# Altium PCB probe.PcbDoc (part 1 of 2)
Units mil, origin at the board's own origin, x right, y up, seen from the top; angles counter-clockwise.
Board outline 2800 x 2200 mil, 4 copper layers (Top Layer, Internal Plane 2, Internal Plane 1, Bottom Layer), stack 30.634 mil thick; 179 components, 135 nets, 563 pads, 179 vias.
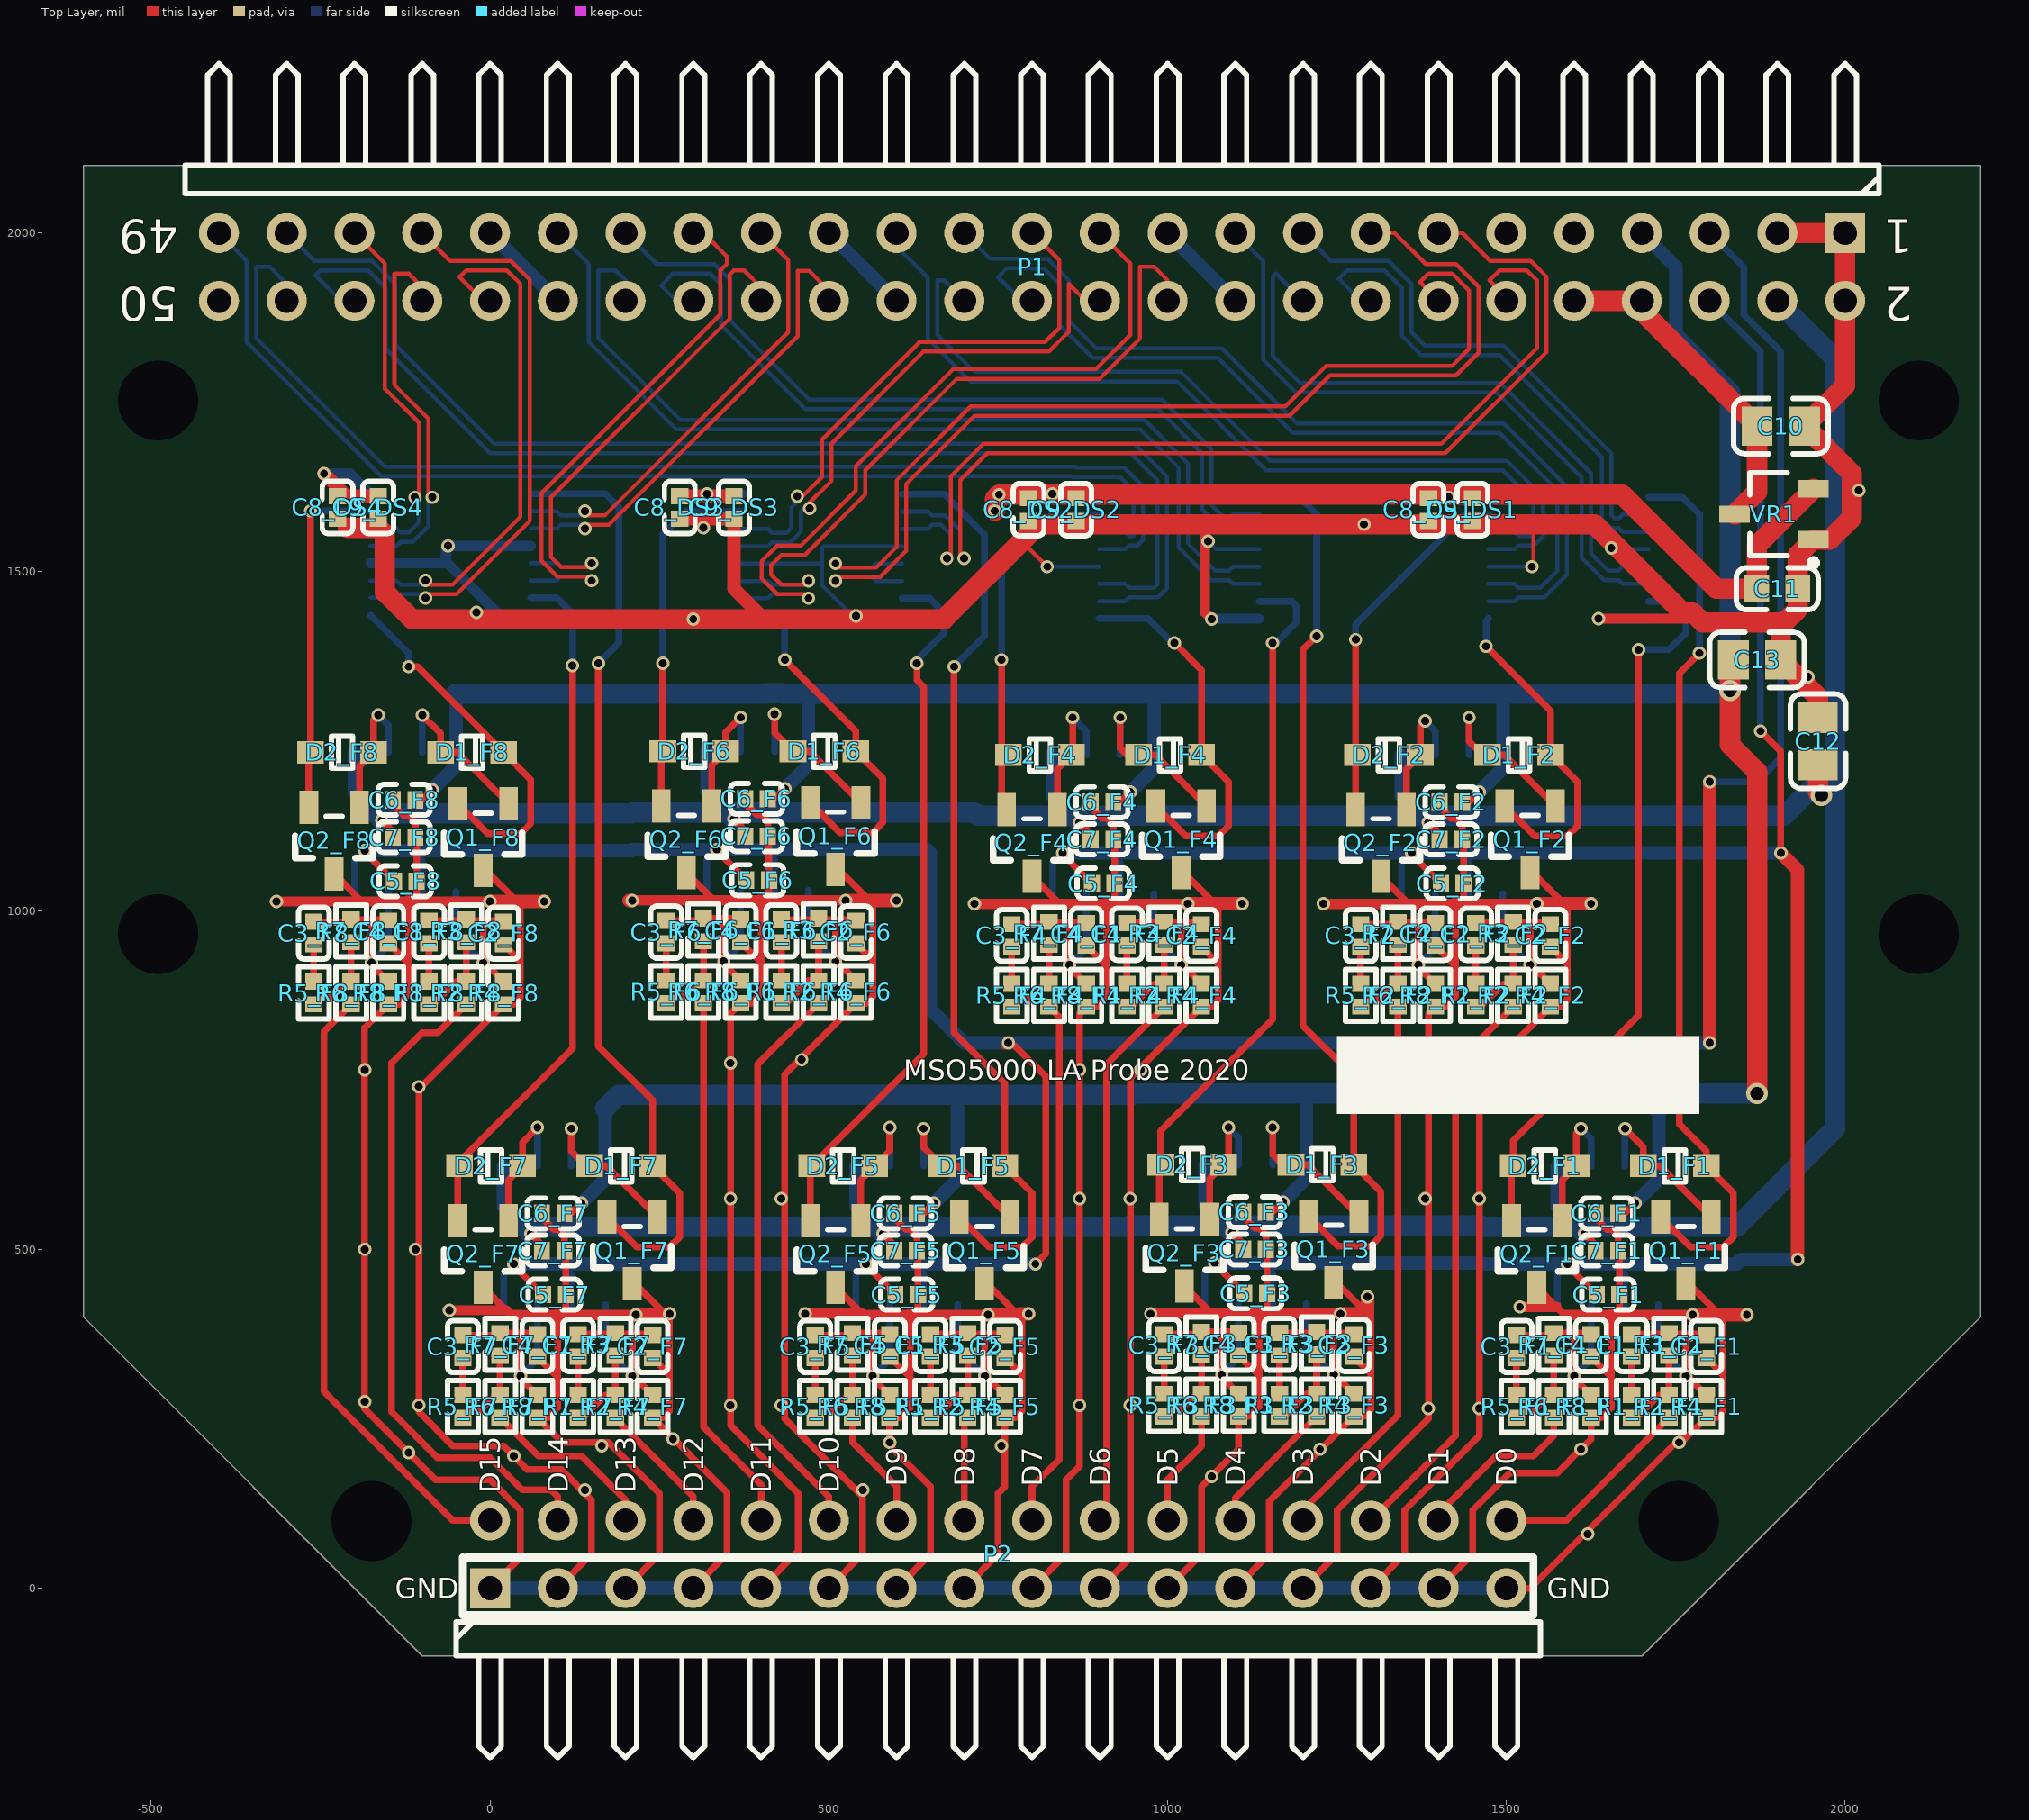
[diagram p0: Top Layer view]
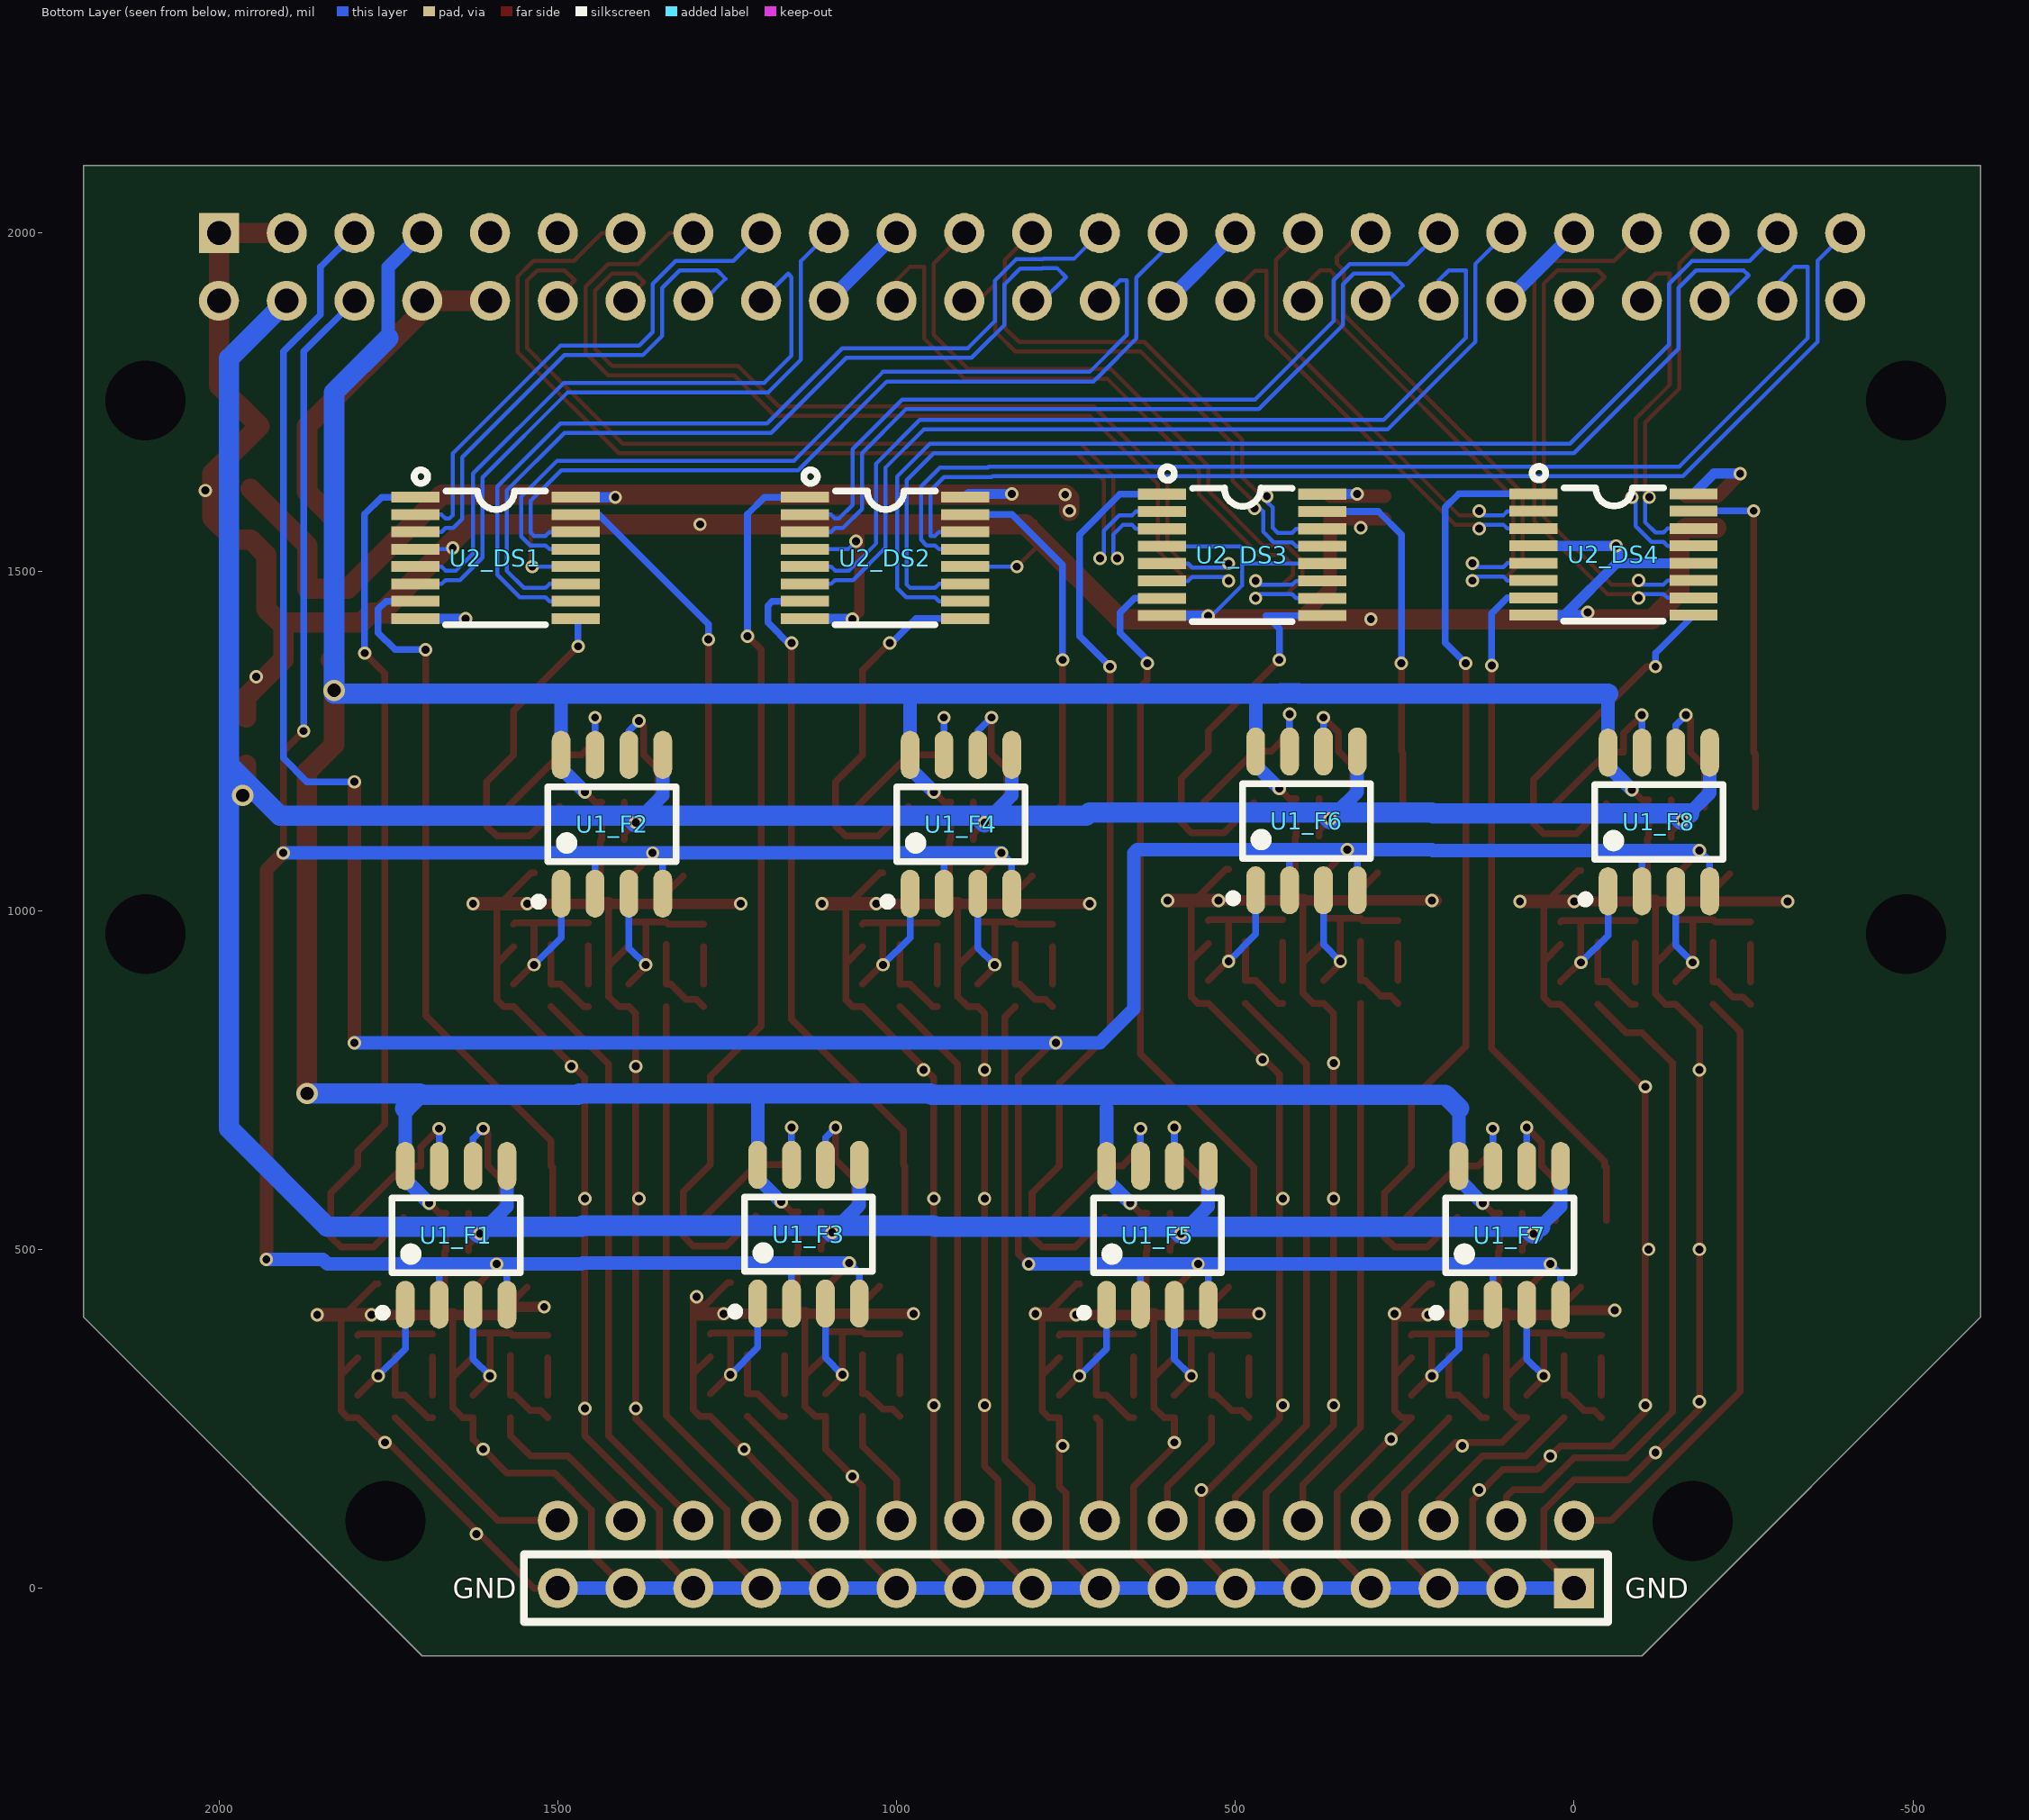
[diagram p1: Bottom Layer view, seen from below]
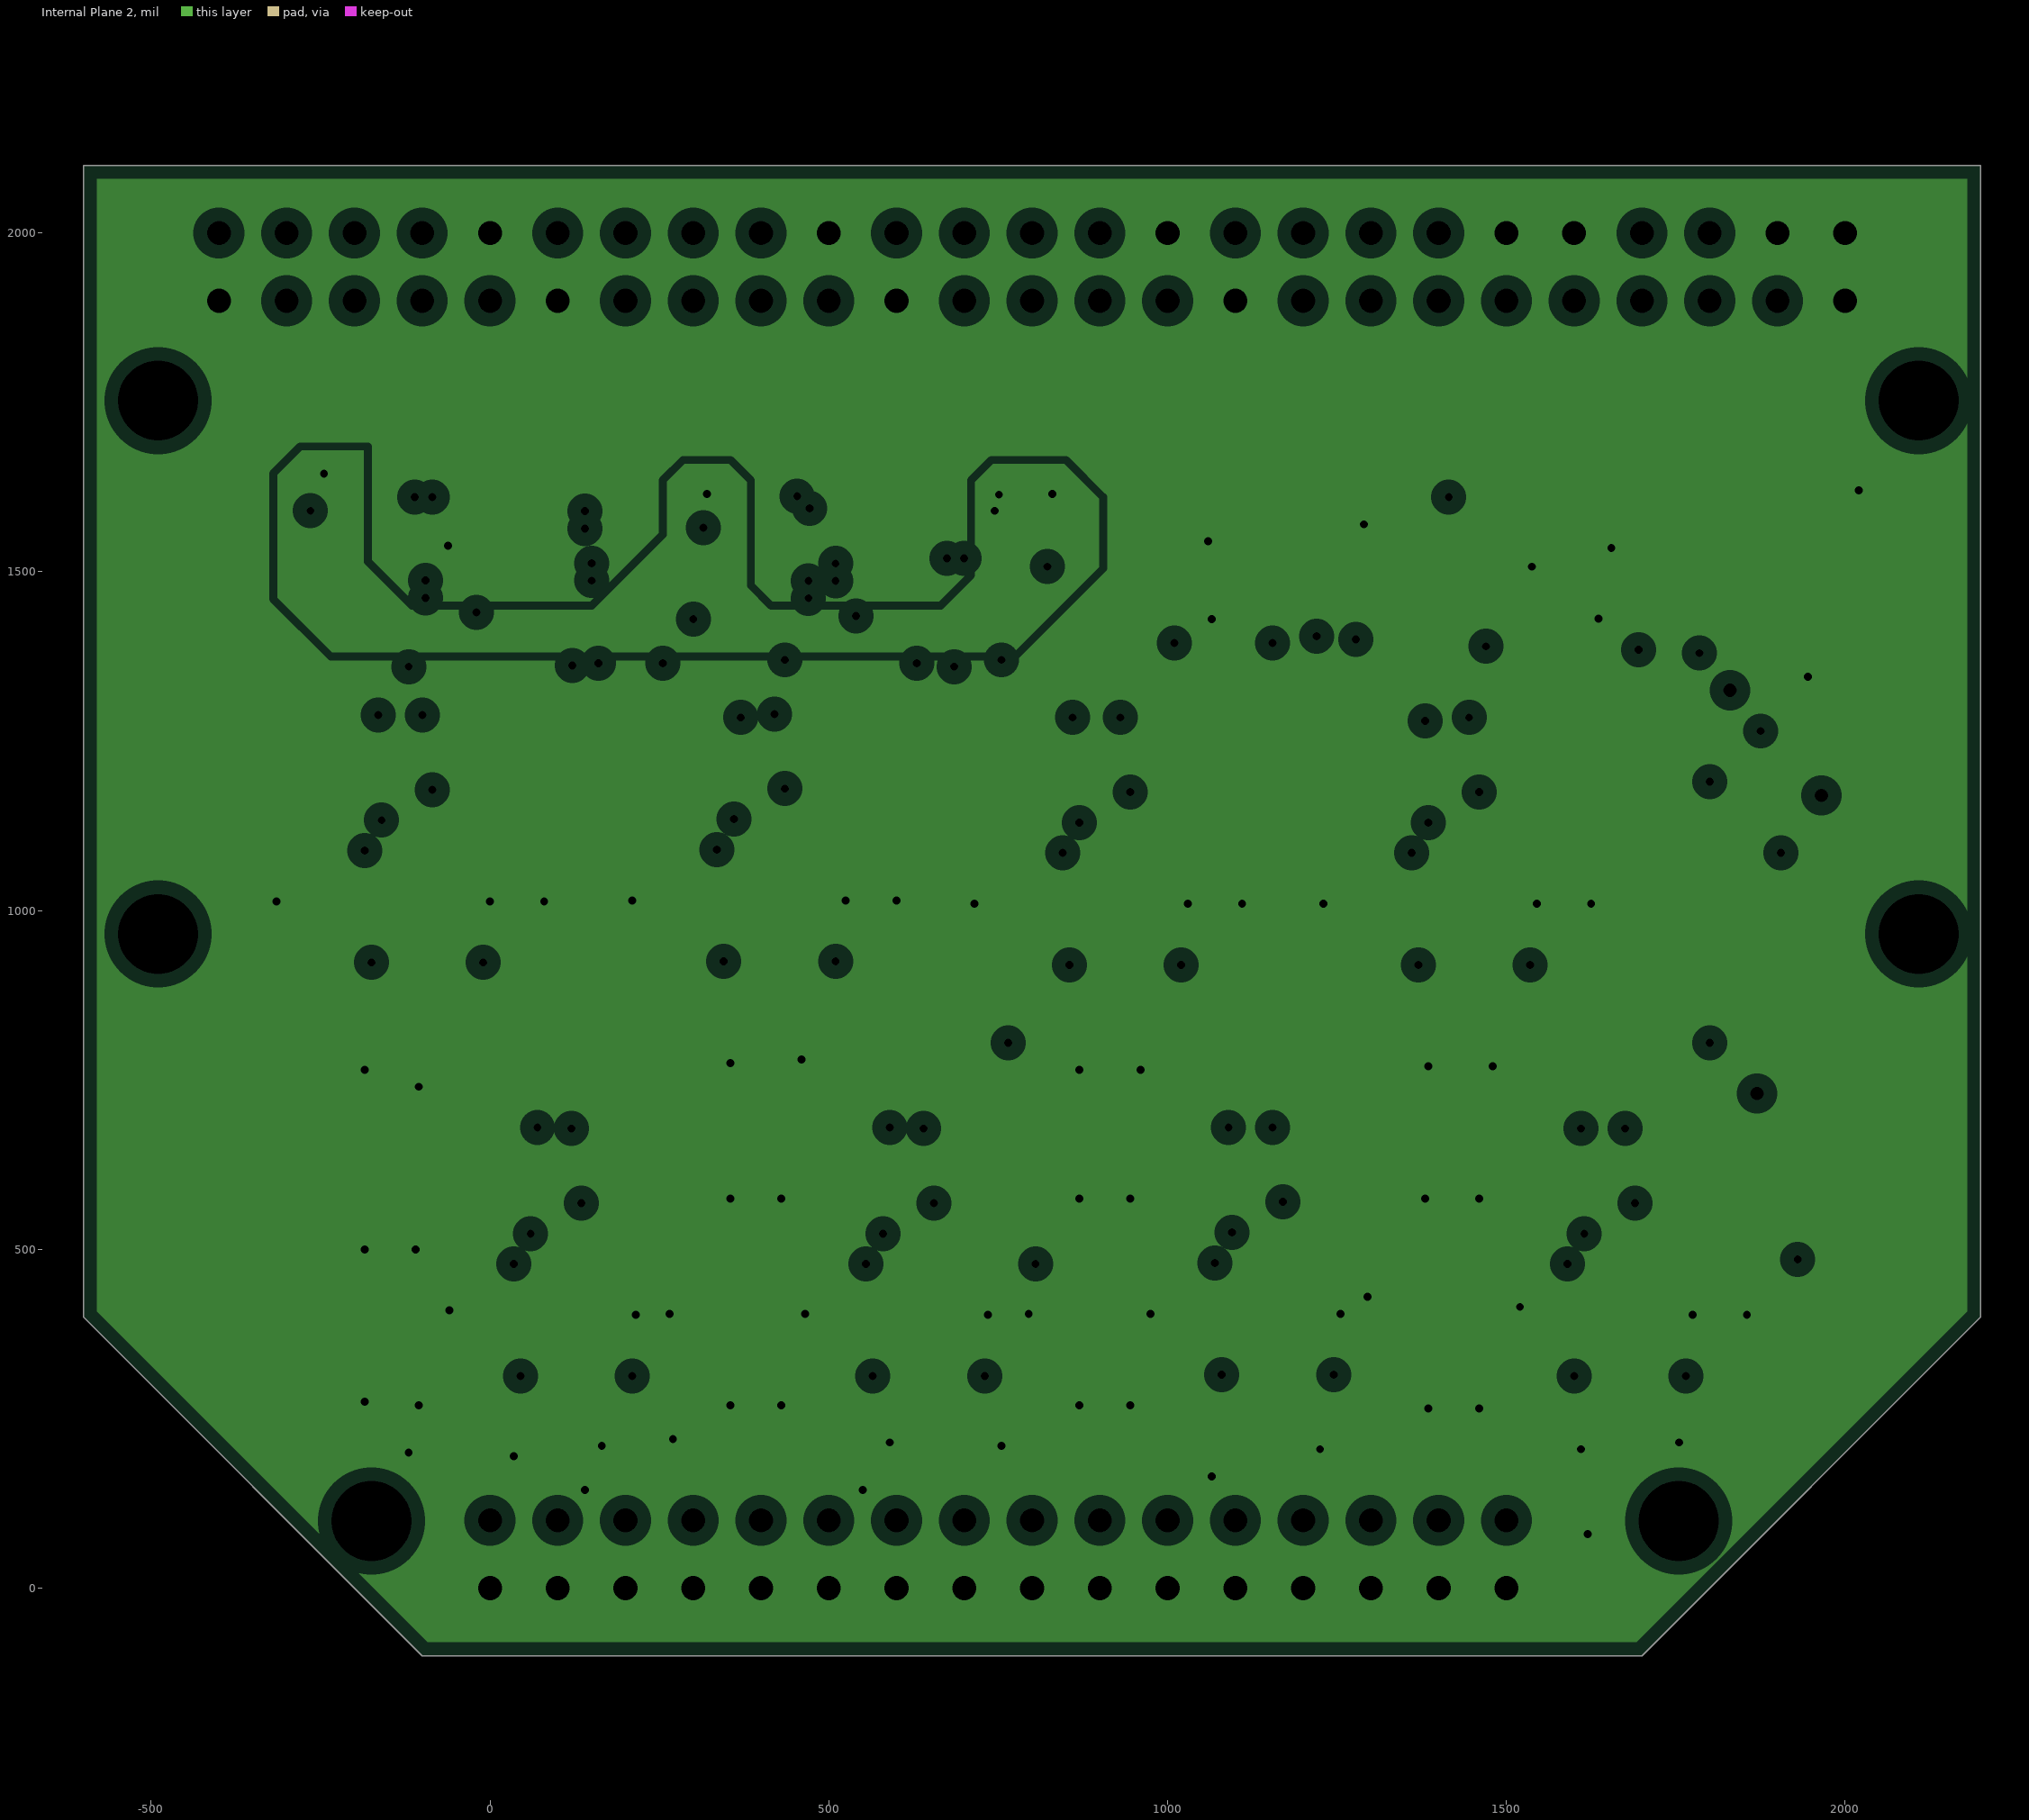
[diagram p2: Internal Plane 2, clearances drawn from the general rule]
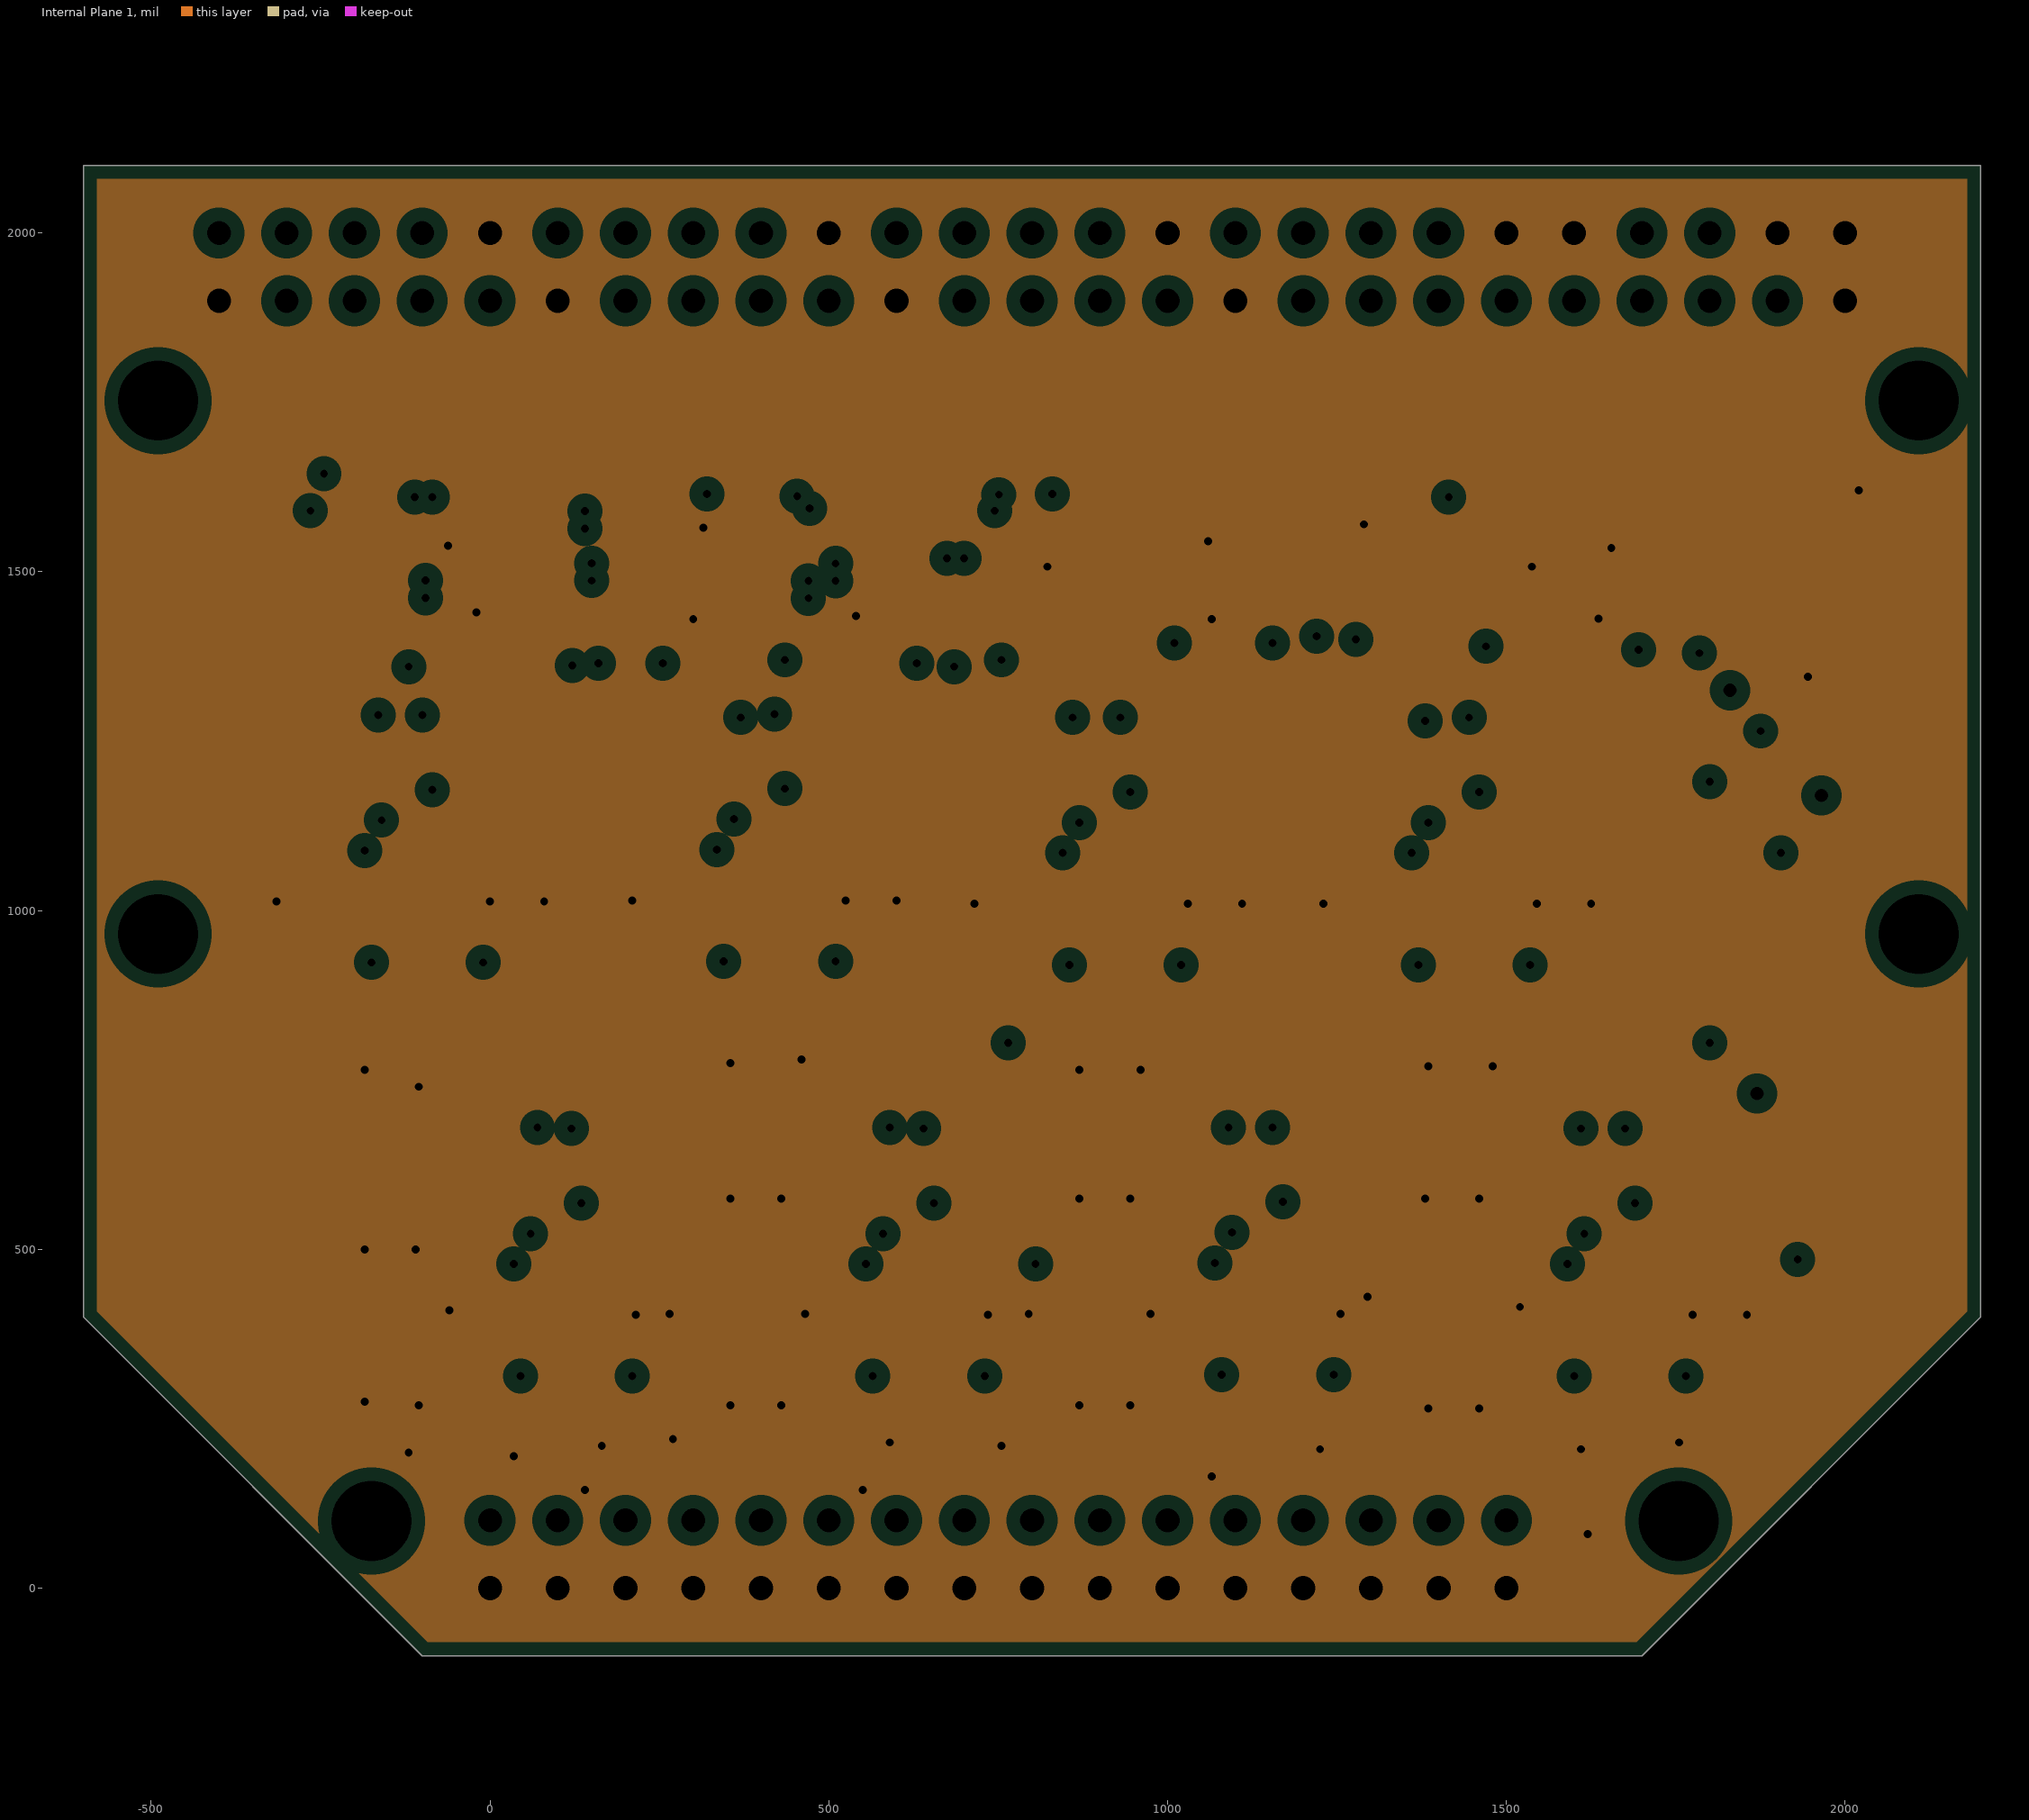
[diagram p3: Internal Plane 1, clearances drawn from the general rule]
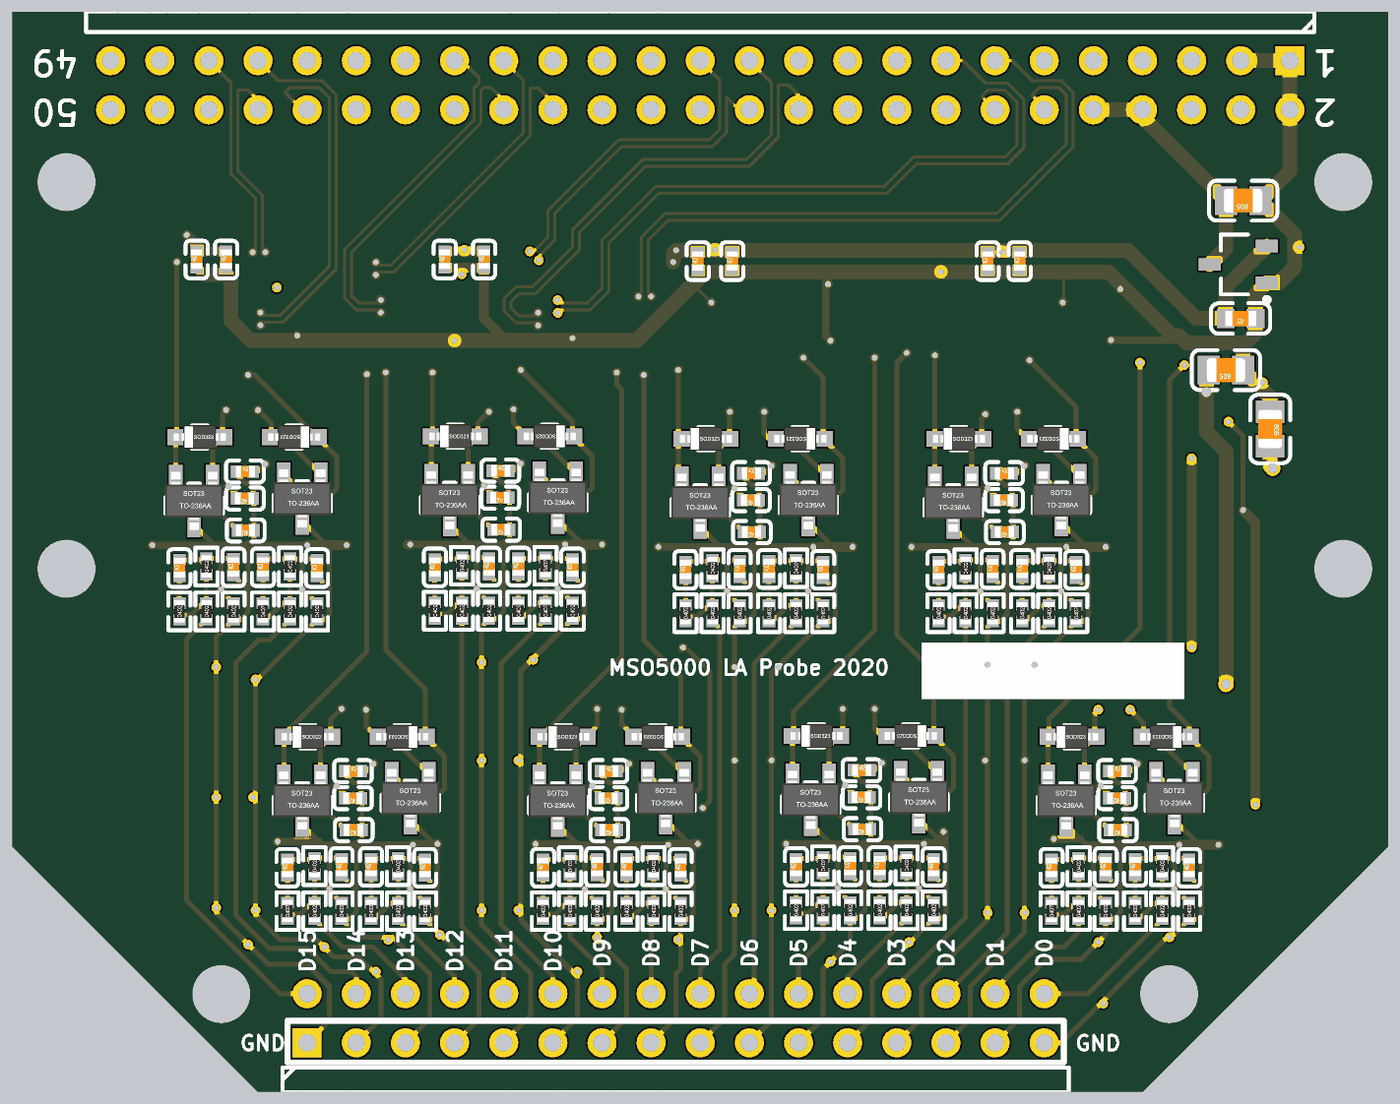
[diagram p5: 3D render of the assembled board from above, using the file's embedded part models]

## Layer stack, top to bottom
Top Solder: solder mask 0.4, Solder Resist, Dk 3.5
Top Layer: signal copper 1.4
Dielectric 1: core 10, FR-4, Dk 4.2
Internal Plane 2: plane copper 1.417, net GND
Dielectric 3: prepreg 5, Dk 4.2
Internal Plane 1: plane copper 1.417, net GND
Dielectric 2: core 10, Dk 4.2
Bottom Layer: signal copper 1.4
Bottom Solder: solder mask 0.4, Solder Resist, Dk 3.5

## Board outline
-600,400 -100,-100 1700,-100 2200,400 2200,2100 -600,2100

## Design rules (kind name [scope] priority, off if disabled: settings)
Clearance [All] p1: gap=6 ignorepadtopadclearanceinfootprint=FALSE
DiffPairsRouting [All] p1: maxlimit=10 minlimit=6 mostfreqgap=8 toplayer_minwidth=6 toplayer_maxwidth=15 toplayer_prefwidth=8 bottomlayer_minwidth=6 bottomlayer_maxwidth=15 bottomlayer_prefwidth=8 maxuncoupledlength=500
HoleSize [All] p1: absolutevalues=TRUE maxlimit=118.11 minlimit=11.81 maxpercent=80.000 minpercent=20.000
MinimumSolderMaskSliver [All] p1: minsoldermaskwidth=0
PlaneClearance [All] p1: clearance=20
PlaneConnect PlaneConnect_1 [IsVia] p1: planeconnectstyle=Direct reliefexpansion=20 reliefentries=4 reliefconductorwidth=10 reliefairgap=10
PlaneConnect [All] p2: planeconnectstyle=Relief reliefexpansion=20 reliefentries=4 reliefconductorwidth=10 reliefairgap=10
PolygonConnect PolygonConnect_1 [All vs isvia] p1: connectstyle=Direct reliefconductorwidth=10 reliefentries=4 polygonreliefangle="90 Angle" airgapwidth=10
PolygonConnect [All] p2: connectstyle=Relief reliefconductorwidth=10 reliefentries=4 polygonreliefangle="90 Angle" airgapwidth=10
RoomDefinition probe [InComponentClass('probe')] p1: confinementstyle=ConfineIn formatcopy=TRUE lockcomponents=FALSE outline 2295,-355 2295,2465 -805,2465 -805,-355
RoomDefinition F8 [InComponentClass('F8')] p2: confinementstyle=ConfineIn formatcopy=TRUE lockcomponents=FALSE outline -335,823.46 100,823.46 100,1398.46 -335,1398.46
RoomDefinition F7 [InComponentClass('F7')] p3: confinementstyle=ConfineIn formatcopy=TRUE lockcomponents=FALSE outline -115,213.27 320,213.27 320,788.27 -115,788.27
RoomDefinition F6 [InComponentClass('F6')] p4: confinementstyle=ConfineIn formatcopy=TRUE lockcomponents=FALSE outline 185,825 620,825 620,1400 185,1400
RoomDefinition F5 [InComponentClass('F5')] p5: confinementstyle=ConfineIn formatcopy=TRUE lockcomponents=FALSE outline 405,213.27 840,213.27 840,788.27 405,788.27
RoomDefinition F4 [InComponentClass('F4')] p6: confinementstyle=ConfineIn formatcopy=TRUE lockcomponents=FALSE outline 695,820 1130,820 1130,1395 695,1395
RoomDefinition F3 [InComponentClass('F3')] p7: confinementstyle=ConfineIn formatcopy=TRUE lockcomponents=FALSE outline 920,215 1355,215 1355,790 920,790
RoomDefinition F2 [InComponentClass('F2')] p8: confinementstyle=ConfineIn formatcopy=TRUE lockcomponents=FALSE outline 1210,820 1645,820 1645,1395 1210,1395
RoomDefinition F1 [InComponentClass('F1')] p9: confinementstyle=ConfineIn formatcopy=FALSE lockcomponents=FALSE outline 1440,213.27 1875,213.27 1875,788.27 1440,788.27
RoomDefinition DS4 [InComponentClass('DS4')] p10: confinementstyle=ConfineIn formatcopy=TRUE lockcomponents=FALSE outline -283.11,1405.43 151.89,1405.43 151.89,1785.43 -283.11,1785.43
RoomDefinition DS3 [InComponentClass('DS3')] p11: confinementstyle=ConfineIn formatcopy=TRUE lockcomponents=FALSE outline 235,1405 700,1405 700,1785 235,1785
RoomDefinition DS2 [InComponentClass('DS2')] p12: confinementstyle=ConfineIn formatcopy=TRUE lockcomponents=FALSE outline 750,1400.43 1226.89,1400.43 1226.89,1785 750,1785
RoomDefinition DS1 [InComponentClass('DS1')] p13: confinementstyle=ConfineIn formatcopy=FALSE lockcomponents=FALSE outline 1340,1400.43 1801.89,1400.43 1801.89,1780 1340,1780
RoutingVias [All] p1: holewidth=11.81 width=19.68 viastyle="Through Hole" minholewidth=11.81 minwidth=19.68 maxholewidth=28 maxwidth=50
SilkToSilkClearance [All] p1: silktosilkclearance=1
SilkToSolderMaskClearance [IsPad] p1: minsilkscreentomaskgap=1 clearancetoexposedcopper=TRUE
SolderMaskExpansion [All] p1: expansion=4
Width [All] p1: maxlimit=30 minlimit=6 preferedwidth=8
23 further rules are at their usual default settings.

## Classes and differential pairs
component class DS1: C8_DS1 C9_DS1 U2_DS1
component class DS2: C8_DS2 C9_DS2 U2_DS2
component class DS3: C8_DS3 C9_DS3 U2_DS3
component class DS4: C8_DS4 C9_DS4 U2_DS4
component class F1: C1_F1 C2_F1 C3_F1 C4_F1 C5_F1 C6_F1 C7_F1 D1_F1 D2_F1 Q1_F1 Q2_F1 R1_F1 R2_F1 R3_F1 R4_F1 R5_F1 R6_F1 R7_F1 R8_F1 U1_F1
component class F2: C1_F2 C2_F2 C3_F2 C4_F2 C5_F2 C6_F2 C7_F2 D1_F2 D2_F2 Q1_F2 Q2_F2 R1_F2 R2_F2 R3_F2 R4_F2 R5_F2 R6_F2 R7_F2 R8_F2 U1_F2
component class F3: C1_F3 C2_F3 C3_F3 C4_F3 C5_F3 C6_F3 C7_F3 D1_F3 D2_F3 Q1_F3 Q2_F3 R1_F3 R2_F3 R3_F3 R4_F3 R5_F3 R6_F3 R7_F3 R8_F3 U1_F3
component class F4: C1_F4 C2_F4 C3_F4 C4_F4 C5_F4 C6_F4 C7_F4 D1_F4 D2_F4 Q1_F4 Q2_F4 R1_F4 R2_F4 R3_F4 R4_F4 R5_F4 R6_F4 R7_F4 R8_F4 U1_F4
component class F5: C1_F5 C2_F5 C3_F5 C4_F5 C5_F5 C6_F5 C7_F5 D1_F5 D2_F5 Q1_F5 Q2_F5 R1_F5 R2_F5 R3_F5 R4_F5 R5_F5 R6_F5 R7_F5 R8_F5 U1_F5
component class F6: C1_F6 C2_F6 C3_F6 C4_F6 C5_F6 C6_F6 C7_F6 D1_F6 D2_F6 Q1_F6 Q2_F6 R1_F6 R2_F6 R3_F6 R4_F6 R5_F6 R6_F6 R7_F6 R8_F6 U1_F6
component class F7: C1_F7 C2_F7 C3_F7 C4_F7 C5_F7 C6_F7 C7_F7 D1_F7 D2_F7 Q1_F7 Q2_F7 R1_F7 R2_F7 R3_F7 R4_F7 R5_F7 R6_F7 R7_F7 R8_F7 U1_F7
component class F8: C1_F8 C2_F8 C3_F8 C4_F8 C5_F8 C6_F8 C7_F8 D1_F8 D2_F8 Q1_F8 Q2_F8 R1_F8 R2_F8 R3_F8 R4_F8 R5_F8 R6_F8 R7_F8 R8_F8 U1_F8
component class probe: C10 C11 C12 C13 P1 P2 VR1
channel class front2ch: F1 F2 F3 F4 F5 F6 F7 F8
channel class lvds4ch: DS1 DS2 DS3 DS4
differential pair D0: +D0_P -D0_N
differential pair D1: +D1_P -D1_N
differential pair D2: +D2_P -D2_N
differential pair D3: +D3_P -D3_N
differential pair D4: +D4_P -D4_N
differential pair D5: +D5_P -D5_N
differential pair D6: +D6_P -D6_N
differential pair D7: +D7_P -D7_N
differential pair D8: +D8_P -D8_N
differential pair D9: +D9_P -D9_N
differential pair D10: +D10_P -D10_N
differential pair D11: +D11_P -D11_N
differential pair D12: +D12_P -D12_N
differential pair D13: +D13_P -D13_N
differential pair D14: +D14_P -D14_N
differential pair D15: +D15_P -D15_N

## Components (designator, comment, footprint, x,y, rotation, side; value= is the part's Value field where it differs from the comment)
C1_F1 "3.3pF (3R3) 0.25pF 50V" 0402_C 1685,358.27 r90 top (schematic designator C1)
C1_F2 "3.3pF (3R3) 0.25pF 50V" 0402_C 1455,965 r90 top (schematic designator C1)
C1_F3 "3.3pF (3R3) 0.25pF 50V" 0402_C 1165,360 r90 top (schematic designator C1)
C1_F4 "3.3pF (3R3) 0.25pF 50V" 0402_C 940,965 r90 top (schematic designator C1)
C1_F5 "3.3pF (3R3) 0.25pF 50V" 0402_C 650,358.27 r90 top (schematic designator C1)
C1_F6 "3.3pF (3R3) 0.25pF 50V" 0402_C 430,970 r90 top (schematic designator C1)
C1_F7 "3.3pF (3R3) 0.25pF 50V" 0402_C 130,358.27 r90 top (schematic designator C1)
C1_F8 "3.3pF (3R3) 0.25pF 50V" 0402_C -90,968.46 r90 top (schematic designator C1)
C2_F1 "27pF (270) 5% 50V" 0402_C 1795,356.54 r90 top (schematic designator C2)
C2_F2 "27pF (270) 5% 50V" 0402_C 1565,963.27 r90 top (schematic designator C2)
C2_F3 "27pF (270) 5% 50V" 0402_C 1275,358.27 r90 top (schematic designator C2)
C2_F4 "27pF (270) 5% 50V" 0402_C 1050,963.27 r90 top (schematic designator C2)
C2_F5 "27pF (270) 5% 50V" 0402_C 760,356.54 r90 top (schematic designator C2)
C2_F6 "27pF (270) 5% 50V" 0402_C 540,968.27 r90 top (schematic designator C2)
C2_F7 "27pF (270) 5% 50V" 0402_C 240,356.54 r90 top (schematic designator C2)
C2_F8 "27pF (270) 5% 50V" 0402_C 20,966.73 r90 top (schematic designator C2)
C3_F1 "3.3pF (3R3) 0.25pF 50V" 0402_C 1515,356.54 r90 top (schematic designator C3)
C3_F2 "3.3pF (3R3) 0.25pF 50V" 0402_C 1285,963.27 r90 top (schematic designator C3)
C3_F3 "3.3pF (3R3) 0.25pF 50V" 0402_C 995,358.27 r90 top (schematic designator C3)
C3_F4 "3.3pF (3R3) 0.25pF 50V" 0402_C 770,963.27 r90 top (schematic designator C3)
C3_F5 "3.3pF (3R3) 0.25pF 50V" 0402_C 480,356.54 r90 top (schematic designator C3)
C3_F6 "3.3pF (3R3) 0.25pF 50V" 0402_C 260,968.27 r90 top (schematic designator C3)
C3_F7 "3.3pF (3R3) 0.25pF 50V" 0402_C -40,356.54 r90 top (schematic designator C3)
C3_F8 "3.3pF (3R3) 0.25pF 50V" 0402_C -260,966.73 r90 top (schematic designator C3)
C4_F1 "27pF (270) 5% 50V" 0402_C 1625,358.27 r90 top (schematic designator C4)
C4_F2 "27pF (270) 5% 50V" 0402_C 1395,965 r90 top (schematic designator C4)
C4_F3 "27pF (270) 5% 50V" 0402_C 1105,360 r90 top (schematic designator C4)
C4_F4 "27pF (270) 5% 50V" 0402_C 880,965 r90 top (schematic designator C4)
C4_F5 "27pF (270) 5% 50V" 0402_C 590,358.27 r90 top (schematic designator C4)
C4_F6 "27pF (270) 5% 50V" 0402_C 370,970 r90 top (schematic designator C4)
C4_F7 "27pF (270) 5% 50V" 0402_C 70,358.27 r90 top (schematic designator C4)
C4_F8 "27pF (270) 5% 50V" 0402_C -150,968.46 r90 top (schematic designator C4)
C5_F1 "10nF (103) 10% 50V" 0402_C 1650,433.27 r180 top (schematic designator C5)
C5_F2 "10nF (103) 10% 50V" 0402_C 1420,1040 r180 top (schematic designator C5)
C5_F3 "10nF (103) 10% 50V" 0402_C 1130,435 r180 top (schematic designator C5)
C5_F4 "10nF (103) 10% 50V" 0402_C 905,1040 r180 top (schematic designator C5)
C5_F5 "10nF (103) 10% 50V" 0402_C 615,433.27 r180 top (schematic designator C5)
C5_F6 "10nF (103) 10% 50V" 0402_C 395,1045 r180 top (schematic designator C5)
C5_F7 "10nF (103) 10% 50V" 0402_C 95,433.27 r180 top (schematic designator C5)
C5_F8 "10nF (103) 10% 50V" 0402_C -125,1043.46 r180 top (schematic designator C5)
C6_F1 "100nF (104) 10% 16V" 0402_C 1648.27,553.27 r0 top (schematic designator C6)
C6_F2 "100nF (104) 10% 16V" 0402_C 1418.27,1160 r0 top (schematic designator C6)
C6_F3 "100nF (104) 10% 16V" 0402_C 1128.27,555 r0 top (schematic designator C6)
C6_F4 "100nF (104) 10% 16V" 0402_C 903.27,1160 r0 top (schematic designator C6)
C6_F5 "100nF (104) 10% 16V" 0402_C 613.27,553.27 r0 top (schematic designator C6)
C6_F6 "100nF (104) 10% 16V" 0402_C 393.27,1165 r0 top (schematic designator C6)
C6_F7 "100nF (104) 10% 16V" 0402_C 93.27,553.27 r0 top (schematic designator C6)
C6_F8 "100nF (104) 10% 16V" 0402_C -126.73,1163.46 r0 top (schematic designator C6)
C7_F1 "100nF (104) 10% 16V" 0402_C 1648.27,498.27 r180 top (schematic designator C7)
C7_F2 "100nF (104) 10% 16V" 0402_C 1418.27,1105 r180 top (schematic designator C7)
C7_F3 "100nF (104) 10% 16V" 0402_C 1128.27,500 r180 top (schematic designator C7)
C7_F4 "100nF (104) 10% 16V" 0402_C 903.27,1105 r180 top (schematic designator C7)
C7_F5 "100nF (104) 10% 16V" 0402_C 613.27,498.27 r180 top (schematic designator C7)
C7_F6 "100nF (104) 10% 16V" 0402_C 393.27,1110 r180 top (schematic designator C7)
C7_F7 "100nF (104) 10% 16V" 0402_C 93.27,498.27 r180 top (schematic designator C7)
C7_F8 "100nF (104) 10% 16V" 0402_C -126.73,1108.46 r180 top (schematic designator C7)
C8_DS1 "10nF (103) 10% 50V" 0402_C 1385,1591.73 r90 top (schematic designator C8)
C8_DS2 "10nF (103) 10% 50V" 0402_C 795,1591.73 r90 top (schematic designator C8)
C8_DS3 "10nF (103) 10% 50V" 0402_C 280,1595 r90 top (schematic designator C8)
C8_DS4 "10nF (103) 10% 50V" 0402_C -225,1595 r90 top (schematic designator C8)
C9_DS1 "100nF (104) 10% 16V" 0402_C 1450,1591.73 r90 top (schematic designator C9)
C9_DS2 "100nF (104) 10% 16V" 0402_C 865,1591.73 r90 top (schematic designator C9)
C9_DS3 "100nF (104) 10% 16V" 0402_C 360,1595 r90 top (schematic designator C9)
C9_DS4 "100nF (104) 10% 16V" 0402_C -165,1595 r90 top (schematic designator C9)
C10 "22uF (226) 20% 25V" 0805_C 1905,1715 r180 top
C11 "2.2uF (225) 10% 16V" 0603_C 1899.69,1475 r180 top
C12 "22uF (226) 20% 25V" 0805_C 1960,1250 r270 top
C13 "22uF (226) 20% 25V" 0805_C 1870,1370 r180 top
D1_F1 "1N4148WS T4" SOD-323 1748.54,623.27 r180 top (schematic designator D1)
D1_F2 "1N4148WS T4" SOD-323 1518.54,1230 r180 top (schematic designator D1)
D1_F3 "1N4148WS T4" SOD-323 1228.54,625 r180 top (schematic designator D1)
D1_F4 "1N4148WS T4" SOD-323 1003.54,1230 r180 top (schematic designator D1)
D1_F5 "1N4148WS T4" SOD-323 713.54,623.27 r180 top (schematic designator D1)
D1_F6 "1N4148WS T4" SOD-323 493.54,1235 r180 top (schematic designator D1)
D1_F7 "1N4148WS T4" SOD-323 193.54,623.27 r180 top (schematic designator D1)
D1_F8 "1N4148WS T4" SOD-323 -26.46,1233.46 r180 top (schematic designator D1)
D2_F1 "1N4148WS T4" SOD-323 1556.46,623.27 r0 top (schematic designator D2)
D2_F2 "1N4148WS T4" SOD-323 1326.46,1230 r0 top (schematic designator D2)
D2_F3 "1N4148WS T4" SOD-323 1036.46,625 r0 top (schematic designator D2)
D2_F4 "1N4148WS T4" SOD-323 811.46,1230 r0 top (schematic designator D2)
D2_F5 "1N4148WS T4" SOD-323 521.46,623.27 r0 top (schematic designator D2)
D2_F6 "1N4148WS T4" SOD-323 301.46,1235 r0 top (schematic designator D2)
D2_F7 "1N4148WS T4" SOD-323 1.46,623.27 r0 top (schematic designator D2)
D2_F8 "1N4148WS T4" SOD-323 -218.54,1233.46 r0 top (schematic designator D2)
P1 "Header 25X2H" HDR2X25H 2000,2000 r180 top
P2 "Header 16X2H" HDR2X16H 0,0 r0 top
Q1_F1 "BSS84LT1G" SOT-23(SOT-23-3) 1765,498.27 r90 top (schematic designator Q1)
Q1_F2 "BSS84LT1G" SOT-23(SOT-23-3) 1535,1105 r90 top (schematic designator Q1)
Q1_F3 "BSS84LT1G" SOT-23(SOT-23-3) 1245,500 r90 top (schematic designator Q1)
Q1_F4 "BSS84LT1G" SOT-23(SOT-23-3) 1020,1105 r90 top (schematic designator Q1)
Q1_F5 "BSS84LT1G" SOT-23(SOT-23-3) 730,498.27 r90 top (schematic designator Q1)
Q1_F6 "BSS84LT1G" SOT-23(SOT-23-3) 510,1110 r90 top (schematic designator Q1)
Q1_F7 "BSS84LT1G" SOT-23(SOT-23-3) 210,498.27 r90 top (schematic designator Q1)
Q1_F8 "BSS84LT1G" SOT-23(SOT-23-3) -10,1108.46 r90 top (schematic designator Q1)
Q2_F1 "BSS84LT1G" SOT-23(SOT-23-3) 1545,493.27 r90 top (schematic designator Q2)
Q2_F2 "BSS84LT1G" SOT-23(SOT-23-3) 1315,1100 r90 top (schematic designator Q2)
Q2_F3 "BSS84LT1G" SOT-23(SOT-23-3) 1025,495 r90 top (schematic designator Q2)
Q2_F4 "BSS84LT1G" SOT-23(SOT-23-3) 800,1100 r90 top (schematic designator Q2)
Q2_F5 "BSS84LT1G" SOT-23(SOT-23-3) 510,493.27 r90 top (schematic designator Q2)
Q2_F6 "BSS84LT1G" SOT-23(SOT-23-3) 290,1105 r90 top (schematic designator Q2)
Q2_F7 "BSS84LT1G" SOT-23(SOT-23-3) -10,493.27 r90 top (schematic designator Q2)
Q2_F8 "BSS84LT1G" SOT-23(SOT-23-3) -230,1103.46 r90 top (schematic designator Q2)
R1_F1 "499Ω (499) ±1%" 0402_R 1685,268.27 r90 top (schematic designator R1)
R1_F2 "499Ω (499) ±1%" 0402_R 1455,875 r90 top (schematic designator R1)
R1_F3 "499Ω (499) ±1%" 0402_R 1165,270 r90 top (schematic designator R1)
R1_F4 "499Ω (499) ±1%" 0402_R 940,875 r90 top (schematic designator R1)
R1_F5 "499Ω (499) ±1%" 0402_R 650,268.27 r90 top (schematic designator R1)
R1_F6 "499Ω (499) ±1%" 0402_R 430,880 r90 top (schematic designator R1)
R1_F7 "499Ω (499) ±1%" 0402_R 130,268.27 r90 top (schematic designator R1)
R1_F8 "499Ω (499) ±1%" 0402_R -90,878.46 r90 top (schematic designator R1)
R2_F1 "300Ω (3000) ±1%" 0402_R 1740,268.27 r90 top (schematic designator R2)
R2_F2 "300Ω (3000) ±1%" 0402_R 1510,875 r90 top (schematic designator R2)
R2_F3 "300Ω (3000) ±1%" 0402_R 1220,270 r90 top (schematic designator R2)
R2_F4 "300Ω (3000) ±1%" 0402_R 995,875 r90 top (schematic designator R2)
R2_F5 "300Ω (3000) ±1%" 0402_R 705,268.27 r90 top (schematic designator R2)
R2_F6 "300Ω (3000) ±1%" 0402_R 485,880 r90 top (schematic designator R2)
R2_F7 "300Ω (3000) ±1%" 0402_R 185,268.27 r90 top (schematic designator R2)
R2_F8 "300Ω (3000) ±1%" 0402_R -35,878.46 r90 top (schematic designator R2)
R3_F1 "90.9KΩ (9092) ±1%" 0402_R 1740,359.8 r90 top (schematic designator R3)
R3_F2 "90.9KΩ (9092) ±1%" 0402_R 1510,966.54 r90 top (schematic designator R3)
R3_F3 "90.9KΩ (9092) ±1%" 0402_R 1220,361.54 r90 top (schematic designator R3)
R3_F4 "90.9KΩ (9092) ±1%" 0402_R 995,966.54 r90 top (schematic designator R3)
R3_F5 "90.9KΩ (9092) ±1%" 0402_R 705,359.8 r90 top (schematic designator R3)
R3_F6 "90.9KΩ (9092) ±1%" 0402_R 485,971.54 r90 top (schematic designator R3)
R3_F7 "90.9KΩ (9092) ±1%" 0402_R 185,359.8 r90 top (schematic designator R3)
R3_F8 "90.9KΩ (9092) ±1%" 0402_R -35,970 r90 top (schematic designator R3)
R4_F1 "10KΩ (1002) ±1%" 0402_R 1795,268.27 r90 top (schematic designator R4)
R4_F2 "10KΩ (1002) ±1%" 0402_R 1565,875 r90 top (schematic designator R4)
R4_F3 "10KΩ (1002) ±1%" 0402_R 1275,270 r90 top (schematic designator R4)
R4_F4 "10KΩ (1002) ±1%" 0402_R 1050,875 r90 top (schematic designator R4)
R4_F5 "10KΩ (1002) ±1%" 0402_R 760,268.27 r90 top (schematic designator R4)
R4_F6 "10KΩ (1002) ±1%" 0402_R 540,880 r90 top (schematic designator R4)
R4_F7 "10KΩ (1002) ±1%" 0402_R 240,268.27 r90 top (schematic designator R4)
R4_F8 "10KΩ (1002) ±1%" 0402_R 20,878.46 r90 top (schematic designator R4)
R5_F1 "499Ω (499) ±1%" 0402_R 1515,268.27 r90 top (schematic designator R5)
R5_F2 "499Ω (499) ±1%" 0402_R 1285,875 r90 top (schematic designator R5)
R5_F3 "499Ω (499) ±1%" 0402_R 995,270 r90 top (schematic designator R5)
R5_F4 "499Ω (499) ±1%" 0402_R 770,875 r90 top (schematic designator R5)
R5_F5 "499Ω (499) ±1%" 0402_R 480,268.27 r90 top (schematic designator R5)
R5_F6 "499Ω (499) ±1%" 0402_R 260,880 r90 top (schematic designator R5)
R5_F7 "499Ω (499) ±1%" 0402_R -40,268.27 r90 top (schematic designator R5)
R5_F8 "499Ω (499) ±1%" 0402_R -260,878.46 r90 top (schematic designator R5)
R6_F1 "300Ω (3000) ±1%" 0402_R 1570,268.27 r90 top (schematic designator R6)
R6_F2 "300Ω (3000) ±1%" 0402_R 1340,875 r90 top (schematic designator R6)
R6_F3 "300Ω (3000) ±1%" 0402_R 1050,270 r90 top (schematic designator R6)
R6_F4 "300Ω (3000) ±1%" 0402_R 825,875 r90 top (schematic designator R6)
R6_F5 "300Ω (3000) ±1%" 0402_R 535,268.27 r90 top (schematic designator R6)
R6_F6 "300Ω (3000) ±1%" 0402_R 315,880 r90 top (schematic designator R6)
R6_F7 "300Ω (3000) ±1%" 0402_R 15,268.27 r90 top (schematic designator R6)
R6_F8 "300Ω (3000) ±1%" 0402_R -205,878.46 r90 top (schematic designator R6)
R7_F1 "90.9KΩ (9092) ±1%" 0402_R 1570,359.8 r90 top (schematic designator R7)
R7_F2 "90.9KΩ (9092) ±1%" 0402_R 1340,966.54 r90 top (schematic designator R7)
R7_F3 "90.9KΩ (9092) ±1%" 0402_R 1050,361.54 r90 top (schematic designator R7)
R7_F4 "90.9KΩ (9092) ±1%" 0402_R 825,966.54 r90 top (schematic designator R7)
R7_F5 "90.9KΩ (9092) ±1%" 0402_R 535,359.8 r90 top (schematic designator R7)
R7_F6 "90.9KΩ (9092) ±1%" 0402_R 315,971.54 r90 top (schematic designator R7)
R7_F7 "90.9KΩ (9092) ±1%" 0402_R 15,359.8 r90 top (schematic designator R7)
R7_F8 "90.9KΩ (9092) ±1%" 0402_R -205,970 r90 top (schematic designator R7)
R8_F1 "10KΩ (1002) ±1%" 0402_R 1625,268.27 r90 top (schematic designator R8)
R8_F2 "10KΩ (1002) ±1%" 0402_R 1395,875 r90 top (schematic designator R8)
R8_F3 "10KΩ (1002) ±1%" 0402_R 1105,270 r90 top (schematic designator R8)
R8_F4 "10KΩ (1002) ±1%" 0402_R 880,875 r90 top (schematic designator R8)
R8_F5 "10KΩ (1002) ±1%" 0402_R 590,268.27 r90 top (schematic designator R8)
R8_F6 "10KΩ (1002) ±1%" 0402_R 370,880 r90 top (schematic designator R8)
R8_F7 "10KΩ (1002) ±1%" 0402_R 70,268.27 r90 top (schematic designator R8)
R8_F8 "10KΩ (1002) ±1%" 0402_R -150,878.46 r90 top (schematic designator R8)
U1_F1 "TLV3502AIDR" SOIC-8_150mil 1650,520.63 r180 bottom (schematic designator U1)
U1_F2 "TLV3502AIDR" SOIC-8_150mil 1420,1127.36 r180 bottom (schematic designator U1)
U1_F3 "TLV3502AIDR" SOIC-8_150mil 1130,522.36 r180 bottom (schematic designator U1)
U1_F4 "TLV3502AIDR" SOIC-8_150mil 905,1127.36 r180 bottom (schematic designator U1)
U1_F5 "TLV3502AIDR" SOIC-8_150mil 615,520.63 r180 bottom (schematic designator U1)
U1_F6 "TLV3502AIDR" SOIC-8_150mil 395,1132.36 r180 bottom (schematic designator U1)
U1_F7 "TLV3502AIDR" SOIC-8_150mil 95,520.63 r180 bottom (schematic designator U1)
U1_F8 "TLV3502AIDR" SOIC-8_150mil -125,1130.83 r180 bottom (schematic designator U1)
U2_DS1 "SN65LVDS31PWR" TSSOP-16_L5.0-W4.4-P0.65-LS6.4-BL 1591.89,1520.43 r270 bottom (schematic designator U2)
U2_DS2 "SN65LVDS31PWR" TSSOP-16_L5.0-W4.4-P0.65-LS6.4-BL 1016.89,1520.43 r270 bottom (schematic designator U2)
U2_DS3 "SN65LVDS31PWR" TSSOP-16_L5.0-W4.4-P0.65-LS6.4-BL 490,1525 r270 bottom (schematic designator U2)
U2_DS4 "SN65LVDS31PWR" TSSOP-16_L5.0-W4.4-P0.65-LS6.4-BL -58.11,1525.43 r270 bottom (schematic designator U2)
VR1 "XC6206P332MR" SOT-23-3L 1895,1585 r0 top

## Footprints (in the part's own frame and the unit in brackets; to place one, negate y for a bottom-side part, rotate by r counter-clockwise, add the part's x,y. Pads: shape width x height; smd on the part's side, far side on the other; paste and mask are expansions set on the pad)
0402_C [mm]
  rect 0.6x0.65 smd mask+0.051: 1(-0.425,0) 2(0.425,0)
  silkscreen extent -0.97,-0.58 0.97,0.58, body extent -0.48,-0.3 0.52,0.3, height 0.2
0402_R [mm]
  rect 0.6x0.65 smd mask+0.051: 1(-0.425,0) 2(0.425,0)
  silkscreen extent -0.97,-0.58 0.97,0.58, body extent -0.57,-0.27 0.58,0.28, height 0.41
0603_C [mm]
  rect 0.93x0.98 smd: 1(-0.77,0) 2(0.77,0)
  silkscreen extent -1.53,-0.79 1.54,0.79, body extent -0.8,-0.4 0.8,0.4, height 0.3
0805_C [mm]
  rect 1.16x1.47 smd: 1(-0.89,0) 2(0.89,0)
  silkscreen extent -1.77,-1.04 1.77,1.04, body extent -1,-0.62 1,0.63, height 0.77
HDR2X16H [mm] "Connector; Header; 16x2 Position; Right Angle"
  rect 1.5x1.5 hole 0.9: 1(0,0)
  round 1.5 hole 0.9: 2(0,2.54) 3(2.54,0) 4(2.54,2.54) 5(5.08,0) 6(5.08,2.54) 7(7.62,0) 8(7.62,2.54) 9(10.16,0) 10(10.16,2.54) 11(12.7,0) 12(12.7,2.54) 13(15.24,0) 14(15.24,2.54) 15(17.78,0) 16(17.78,2.54) 17(20.32,0) 18(20.32,2.54) 19(22.86,0) 20(22.86,2.54) 21(25.4,0) 22(25.4,2.54) 23(27.94,0) 24(27.94,2.54) 25(30.48,0) 26(30.48,2.54) 27(33.02,0) 28(33.02,2.54) 29(35.56,0) 30(35.56,2.54) 31(38.1,0) 32(38.1,2.54)
  silkscreen extent -1.27,-6.35 39.37,-1.27
HDR2X25H [mm] "Connector; Header; 25x2 Position; Right Angle"
  rect 1.5x1.5 hole 0.9: 1(0,0)
  round 1.5 hole 0.9: 2(0,2.54) 3(2.54,0) 4(2.54,2.54) 5(5.08,0) 6(5.08,2.54) 7(7.62,0) 8(7.62,2.54) 9(10.16,0) 10(10.16,2.54) 11(12.7,0) 12(12.7,2.54) 13(15.24,0) 14(15.24,2.54) 15(17.78,0) 16(17.78,2.54) 17(20.32,0) 18(20.32,2.54) 19(22.86,0) 20(22.86,2.54) 21(25.4,0) 22(25.4,2.54) 23(27.94,0) 24(27.94,2.54) 25(30.48,0) 26(30.48,2.54) 27(33.02,0) 28(33.02,2.54) 29(35.56,0) 30(35.56,2.54) 31(38.1,0) 32(38.1,2.54) 33(40.64,0) 34(40.64,2.54) 35(43.18,0) 36(43.18,2.54) 37(45.72,0) 38(45.72,2.54) 39(48.26,0) 40(48.26,2.54) 41(50.8,0) 42(50.8,2.54) 43(53.34,0) 44(53.34,2.54) 45(55.88,0) 46(55.88,2.54) 47(58.42,0) 48(58.42,2.54) 49(60.96,0) 50(60.96,2.54)
  silkscreen extent -1.27,-6.35 62.23,-1.48
SOD-323 [mm]
  rect 1x0.83 smd: 1(1.18,0) 2(-1.18,0)
  silkscreen extent -0.4,-0.6 0.4,0.6, body extent -1.35,-0.62 1.35,0.63, height 1.1
SOIC-8_150mil [mm]
  oval 0.7x1.8 smd: 1(-1.905,-2.6) 2(-0.635,-2.6) 3(0.635,-2.6) 4(1.905,-2.6) 5(1.905,2.6) 6(0.635,2.6) 7(-0.635,2.6) 8(-1.905,2.6)
  silkscreen extent -2.9,-3.05 2.4,1.4
SOT-23(SOT-23-3) [mm]
  rect 1.25x0.7 smd: 1(1.25,-0.95) 2(1.25,0.95) 3(-1.25,0)
  silkscreen extent -0.65,-1.46 0.9,1.46, body extent -1.5,-1.5 1.5,1.5, height 1.3
SOT-23-3L [mm] "http://www.aosmd.com/res/packaging_information/SOT-23-3L.pdf"
  rect 1.15x0.65 smd: 1(1.475,-0.95) 2(1.475,0.95) 3(-1.475,0)
  silkscreen extent -0.9,-1.95 1.6,1.55, body extent -0.9,-1.55 0.9,1.55, height 1.25
TSSOP-16_L5.0-W4.4-P0.65-LS6.4-BL [mil]
  rect 16x71 smd: 1(-89.57,-118.11) 2(-63.98,-118.11) 3(-38.39,-118.11) 4(-12.8,-118.11) 5(12.8,-118.11) 6(38.39,-118.11) 7(63.98,-118.11) 8(89.57,-118.11) 9(89.57,118.11) 10(63.98,118.11) 11(38.39,118.11) 12(12.8,118.11) 13(-12.8,118.11) 14(-38.39,118.11) 15(-63.98,118.11) 16(-89.57,118.11)
  silkscreen extent -130,-120 98,74

## Part data
C1_F1 C1_F2 C1_F3 C1_F4 C1_F5 C1_F6 C1_F7 C1_F8 C3_F1 C3_F2 C3_F3 C3_F4 C3_F5 C3_F6 C3_F7 C3_F8: library part "0402 3.3pF (3R3) 0.25pF 50V", "贴片电容", Package=0402, SuppliersPartNumber=C1565, ComponentLink1Description=供应商链接, ComponentLink1URL=http://www.szlcsc.com/product/details_1917.html, Supplier=LC
C2_F1 C2_F2 C2_F3 C2_F4 C2_F5 C2_F6 C2_F7 C2_F8 C4_F1 C4_F2 C4_F3 C4_F4 C4_F5 C4_F6 C4_F7 C4_F8: library part "0402 27pF (270) 5% 50V", "贴片电容", Package=0402, SuppliersPartNumber=C1557, ComponentLink1Description=供应商链接, ComponentLink1URL=http://www.szlcsc.com/product/details_1909.html, Supplier=LC
C5_F1 C5_F2 C5_F3 C5_F4 C5_F5 C5_F6 C5_F7 C5_F8 C8_DS1 C8_DS2 C8_DS3 C8_DS4: library part "0402 10nF (103) 10% 50V", "贴片电容", Package=0402, SuppliersPartNumber=C15195, ComponentLink1Description=供应商链接, ComponentLink1URL=http://www.szlcsc.com/product/details_15869.html, Supplier=LC
C6_F1 C6_F2 C6_F3 C6_F4 C6_F5 C6_F6 C6_F7 C6_F8 C7_F1 C7_F2 C7_F3 C7_F4 C7_F5 C7_F6 C7_F7 C7_F8 C9_DS1 C9_DS2 C9_DS3 C9_DS4: library part "0402 100nF (104) 10% 16V", "贴片电容", Package=0402, SuppliersPartNumber=C1525, ComponentLink1Description=供应商链接, ComponentLink1URL=http://www.szlcsc.com/product/details_1877.html, Supplier=LC
C10 C12 C13: library part "0805 22uF (226) 20% 25V", "贴片电容", Package=0805, SuppliersPartNumber=C45783, ComponentLink1Description=供应商链接, ComponentLink1URL=http://www.szlcsc.com/product/details_46786.html, Supplier=LC
C11: library part "0603 2.2uF (225) 10% 16V", "贴片电容", Package=0603, SuppliersPartNumber=C23630, ComponentLink1Description=供应商链接, ComponentLink1URL=http://www.szlcsc.com/product/details_24366.html, Supplier=LC
D1_F1 D1_F2 D1_F3 D1_F4 D1_F5 D1_F6 D1_F7 D1_F8 D2_F1 D2_F2 D2_F3 D2_F4 D2_F5 D2_F6 D2_F7 D2_F8: library part "SOD-323 1N4148WS T4", "二极管", Package=SOD-323, SuppliersPartNumber=C2128, ComponentLink1Description=供应商链接, ComponentLink1URL=http://www.szlcsc.com/product/details_2485.html, Supplier=LC
P1: "Header, 25-Pin, Dual row, Right Angle", LatestRevisionDate=17-Jul-2002, LatestRevisionNote="Re-released for DXP Platform.", Publisher="Altium Limited"
P2: "Header, 16-Pin, Dual row, Right Angle", LatestRevisionDate=17-Jul-2002, LatestRevisionNote="Re-released for DXP Platform.", Publisher="Altium Limited"
Q1_F1 Q1_F2 Q1_F3 Q1_F4 Q1_F5 Q1_F6 Q1_F7 Q1_F8 Q2_F1 Q2_F2 Q2_F3 Q2_F4 Q2_F5 Q2_F6 Q2_F7 Q2_F8: "MOS(场效应管)", Package=SOT-23(SOT-23-3), SuppliersPartNumber=C8492, ComponentLink1Description=供应商链接, ComponentLink1URL=http://www.szlcsc.com/product/details_8986.html, Supplier=LC
R1_F1 R1_F2 R1_F3 R1_F4 R1_F5 R1_F6 R1_F7 R1_F8 R5_F1 R5_F2 R5_F3 R5_F4 R5_F5 R5_F6 R5_F7 R5_F8: library part "0402 49.9Ω (49R9) 1%", "贴片电阻", Package=0402, SuppliersPartNumber=C57982, ComponentLink1Description=供应商链接, ComponentLink1URL=http://www.szlcsc.com/product/details_25863.html, Supplier=LC
R2_F1 R2_F2 R2_F3 R2_F4 R2_F5 R2_F6 R2_F7 R2_F8 R6_F1 R6_F2 R6_F3 R6_F4 R6_F5 R6_F6 R6_F7 R6_F8: library part "0402 300Ω (3000) 1%", "贴片电阻", Package=0402, SuppliersPartNumber=C25102, ComponentLink1Description=供应商链接, ComponentLink1URL=http://www.szlcsc.com/product/details_25845.html, Supplier=LC
R3_F1 R3_F2 R3_F3 R3_F4 R3_F5 R3_F6 R3_F7 R3_F8 R7_F1 R7_F2 R7_F3 R7_F4 R7_F5 R7_F6 R7_F7 R7_F8: library part "0402 8.2KΩ (8201) 1%", "贴片电阻", Package=0402, SuppliersPartNumber=C26989, ComponentLink1Description=供应商链接, ComponentLink1URL=http://www.szlcsc.com/product/details_26667.html, Supplier=LC
R4_F1 R4_F2 R4_F3 R4_F4 R4_F5 R4_F6 R4_F7 R4_F8 R8_F1 R8_F2 R8_F3 R8_F4 R8_F5 R8_F6 R8_F7 R8_F8: library part "0402 10KΩ (1002) 1%", "贴片电阻", Package=0402, SuppliersPartNumber=C25744, ComponentLink1Description=供应商链接, ComponentLink1URL=http://www.szlcsc.com/product/details_26487.html, Supplier=LC
U1_F1 U1_F2 U1_F3 U1_F4 U1_F5 U1_F6 U1_F7 U1_F8: BOM_LCSC Assembly=Yes, BOM_Manufacturer=TI, BOM_Manufacturer Part=TLV3502AIDR, BOM_Supplier=LCSC, BOM_Supplier Part=C131165, Contributor=LCSC, SMT Type=Extend, spicePre=U, spiceSymbolName=TLV3502AIDR
U2_DS1 U2_DS2 U2_DS3 U2_DS4: BOM_LCSC Assembly=Yes, BOM_Manufacturer=TI, Voltage - Supply="3V ~ 3.6V", BOM_Manufacturer Part=SN65LVDS31PWR, BOM_Supplier=LCSC, BOM_Supplier Part=C181630, Contributor=LCSC, SMT Type=Extend, spicePre=U, spiceSymbolName=SN65LVDS31PWR, Type=Driver
VR1: library part "SOT-23 XC6206P332MR", "低压差线性稳压(LDO)", Package=SOT-23, SuppliersPartNumber=C5446, ComponentLink1Description=供应商链接, ComponentLink1URL=http://www.szlcsc.com/product/details_5896.html, Supplier=LC

## Free pads (board coordinates)
  rect 0x0 hole 118.11 unplated: HOLE1(1754.33,99.21) HOLE2(-174.8,99.21) HOLE3(2108.66,965.35) HOLE4(-489.76,965.35) HOLE5(-489.76,1752.76) HOLE6(2108.66,1752.76)

## Via types
v1: diameter 19.68, hole 11.81, Top Layer to Bottom Layer, tented both sides, 126 vias
v2: diameter 19.68, hole 11.81, Top Layer to Bottom Layer, 50 vias
v3: diameter 31.5, hole 19.68, Top Layer to Bottom Layer, 2 vias
v4: diameter 31.5, hole 19.68, Top Layer to Bottom Layer, tented both sides, 1 vias

## Nets (pads, with @x,y where several pads share a name; then routed paths per layer and width w, separated by ;. In a path a pad name is that pad's centre, name@x,y a point inside that pad or via, vN(x,y) a via of type N, cw(c..) or ccw(c..) an arc to the next point about the centre after c; other vN are vias at no path point)
+2V5: C6_F1.2 C6_F2.2 C6_F3.2 C6_F4.2 C6_F5.2 C6_F6.2 C6_F7.2 C6_F8.2 C13.2 P1.7 U1_F1.8 U1_F2.8 U1_F3.8 U1_F4.8 U1_F5.8 U1_F6.8 U1_F7.8 U1_F8.8 | length 6523.1
  Top Layer w10: C6_F8.2@-110,1163.46 -100,1163.46 v1(-85,1178.46) ; C6_F7.2@110,553.27 120,553.27 v1(135,568.27) ; C6_F6.2@410,1165 420,1165 v1(435,1180) ; C6_F5.2@630,553.27 640,553.27 v1(655,568.27) ; C6_F4.2@920,1160 930,1160 v1(945,1175) ; C6_F3.2@1145,555 1155,555 v1(1170,570) ; C6_F2.2@1435,1160 1445,1160 v1(1460,1175) ; C6_F1.2@1665,553.27 1675,553.27 v1(1690,568.27)
  Top Layer w30: C13.2@1834.96,1370 1830,1365.04 v4(1830,1325) 1830,1245 1870,1205 v3(1870,730)
  Bottom Layer w10: U1_F8.8@-50,1213.46 U1_F8.8@-50,1233.19 ; U1_F7.8@170,603.27 U1_F7.8@170,622.99 ; U1_F6.8@470,1215 U1_F6.8@470,1234.72 ; U1_F5.8@690,603.27 U1_F5.8@690,622.99 ; U1_F4.8@980,1210 U1_F4.8@980,1229.72 ; U1_F3.8@1205,605 U1_F3.8@1205,624.72 ; U1_F2.8@1495,1210 U1_F2.8@1495,1229.72 ; U1_F1.8@1725,603.27 U1_F1.8@1725,622.99
  Bottom Layer w20: v1(-85,1178.46) U1_F8.8@-50,1213.46 ; U1_F8.8@-50,1233.19 -50,1318.46 ; v1(135,568.27) U1_F7.8@170,603.27 ; U1_F7.8@170,622.99 170,708.27 ; v1(435,1180) U1_F6.8@470,1215 ; U1_F6.8@470,1234.72 470,1320 ; v1(655,568.27) U1_F5.8@690,603.27 ; U1_F5.8@690,622.99 690,708.27 ; v1(945,1175) U1_F4.8@980,1210 ; U1_F4.8@980,1229.72 980,1315 ; v1(1170,570) U1_F3.8@1205,605 ; U1_F3.8@1205,624.72 1205,725 1210,730 ; v1(1460,1175) U1_F2.8@1495,1210 ; U1_F2.8@1495,1229.72 1495,1315 ; v1(1690,568.27) U1_F1.8@1725,603.27 ; P1.7@1700,2000 1750,1950 1750,1845 ; U1_F1.8@1725,622.99 1725,708.27
  Bottom Layer w30: -50,1320 406.38,1320 407.22,1320.84 432.78,1320.84 433.62,1320 470,1320 1830,1320 v4(1830,1325) 1830,1765 1750,1845 ; 170,708.27 190,728.27 948.27,728.27 950,730 1210,730 1468.27,730 1470,728.27 1705,728.27 ; 1725,708.27 1705,728.27 ; v3(1870,730) 1703.27,730 1705,728.27
+3V3: C8_DS1.2 C8_DS2.2 C8_DS3.2 C8_DS4.2 C9_DS1.2 C9_DS2.2 C9_DS3.2 C9_DS4.2 C11.2 U2_DS1.16 U2_DS2.16 U2_DS3.16 U2_DS4.16 VR1.2 | length 1821
  Top Layer w20: v1(-245,1645) -211.73,1611.73 C9_DS4.2@-165,1611.73 ; C8_DS3.2@280,1611.73 C9_DS3.2@360,1611.73
  Top Layer w30: v1(745,1590) 745,1607.8 v1(751.1,1613.9) 1671.1,1613.9 1810,1475 C11.2@1869.37,1475 1869.37,1538.7 VR1.2@1953.07,1622.4
  Bottom Layer w15: v1(-245,1645) -206.22,1645 U2_DS4.16@-176.22,1615 ; v2(320,1615) 371.46,1615 U2_DS3.16@371.89,1614.57 ; v2(830,1615) 893.78,1615 U2_DS2.16@898.78,1610 ; v2(1415,1610) U2_DS1.16@1473.78,1610
+4V: C10.2 P1.8 P1.10 VR1.3 | length 499.1
  Top Layer w30: P1.10@1600,1900 P1.8@1700,1900 1700,1884.96 C10.2@1869.96,1715 1869.96,1618.03 VR1.3@1836.93,1585
-2V5: C7_F1.2 C7_F2.2 C7_F3.2 C7_F4.2 C7_F5.2 C7_F6.2 C7_F7.2 C7_F8.2 C12.2 P1.4 U1_F1.5 U1_F2.5 U1_F3.5 U1_F4.5 U1_F5.5 U1_F6.5 U1_F7.5 U1_F8.5 | length 6815.8
  Top Layer w10: v1(-160,1133.46) -143.46,1116.93 C7_F8.2@-143.46,1108.46 ; v1(60,523.27) 76.54,506.73 C7_F7.2@76.54,498.27 ; v1(360,1135) 376.54,1118.46 C7_F6.2@376.54,1110 ; v1(580,523.27) 596.54,506.73 C7_F5.2@596.54,498.27 ; v1(870,1130) 886.54,1113.46 C7_F4.2@886.54,1105 ; v1(1095,525) 1111.54,508.46 C7_F3.2@1111.54,500 ; v1(1385,1130) 1401.54,1113.46 C7_F2.2@1401.54,1105 ; v1(1615,523.27) 1631.54,506.73 C7_F1.2@1631.54,498.27
  Top Layer w30: C12.2@1960,1214.96 1960,1175 v3(1965,1170)
  Bottom Layer w10: -170,1143.46 v1(-160,1133.46) ; 50,533.27 v1(60,523.27) ; 350,1145 v1(360,1135) ; 570,533.27 v1(580,523.27) ; 860,1140 v1(870,1130) ; 1085,535 v1(1095,525) ; 1375,1140 v1(1385,1130) ; 1605,533.27 v1(1615,523.27)
  Bottom Layer w20: U1_F8.5@-200,1233.19 -200,1173.46 -170,1143.46 ; U1_F7.5@20,622.99 20,563.27 50,533.27 ; U1_F6.5@320,1234.72 320,1175 350,1145 ; U1_F5.5@540,622.99 540,563.27 570,533.27 ; U1_F4.5@830,1229.72 830,1170 860,1140 ; U1_F3.5@1055,624.72 1055,565 1085,535 ; U1_F2.5@1345,1229.72 1345,1170 1375,1140 ; U1_F1.5@1575,622.99 1575,563.27 1605,533.27
  Bottom Layer w30: -170,1143.46 -150,1143.46 ; v1(-160,1133.46) -150,1143.46 ; 50,533.27 70,533.27 ; v1(60,523.27) 70,533.27 ; v1(360,1135) 370,1145 ; v1(580,523.27) 590,533.27 ; v1(870,1130) 880,1140 ; v1(1095,525) 1105,535 ; v1(1385,1130) 1395,1140 ; v1(1615,523.27) 1625,533.27 ; P1.4@1900,1900 1985,1815 1985,1215 ; v3(1965,1170) 1985,1190 ; -150,1143.46 208.46,1143.46 210,1145 350,1145 370,1145 ; 70,533.27 570,533.27 590,533.27 ; 370,1145 715,1145 720,1140 860,1140 880,1140 ; 590,533.27 943.27,533.27 945,535 1085,535 1105,535 ; 880,1140 1375,1140 1395,1140 ; 1105,535 1463.27,535 1465,533.27 1605,533.27 1625,533.27 ; 1395,1140 1910,1140 1985,1215 ; 1625,533.27 1840,533.27 1985,678.27 1985,1190 ; 1985,1190 1985,1215
CH0: P2.32 R2_F1.1 | length 302.8
  Top Layer w10: P2.32@1500,100 1588.46,100 R2_F1.1@1740,251.54
CH1: P2.30 R6_F1.1 | length 254.2
  Top Layer w10: P2.30@1400,100 1400,110 1485,195 1540,195 1570,225 R6_F1.1@1570,251.54
CH2: P2.28 R2_F2.1 | length 845.3
  Top Layer w10: P2.28@1300,100 1425,225 1425,773.27 R2_F2.1@1510,858.27
CH3: P2.26 R6_F2.1 | length 816.3
  Top Layer w10: P2.26@1200,100 1200,115 1340,255 R6_F2.1@1340,858.27
CH4: P2.24 R2_F3.1 | length 203
  Top Layer w10: P2.24@1100,100 1100,133.27 R2_F3.1@1220,253.27
CH5: P2.22 R6_F3.1 | length 174
  Top Layer w10: P2.22@1000,100 1000,160 1050,210 R6_F3.1@1050,253.27
CH6: P2.20 R2_F4.1 | length 797.6
  Top Layer w10: P2.20@900,100 900,110 910,120 910,773.27 R2_F4.1@995,858.27
CH7: P2.18 R6_F4.1 | length 781
  Top Layer w10: P2.18@800,100 800,150 840,190 840,843.27 R6_F4.1@825,858.27
CH8: P2.16 R2_F5.1 | length 153.6
  Top Layer w10: P2.16@700,100 700,246.54 R2_F5.1@705,251.54
CH9: P2.14 R6_F5.1 | length 178.5
  Top Layer w10: R6_F5.1@535,251.54 535,215 600,150 P2.14@600,100
CH10: P2.12 R2_F6.1 | length 844
  Top Layer w10: R2_F6.1@485,863.27 395,773.27 395,240 500,135 P2.12@500,100
CH11: P2.10 R6_F6.1 | length 798.5
  Top Layer w10: R6_F6.1@315,863.27 315,237.37 400,152.37 P2.10@400,100
CH12: P2.8 R2_F7.1 | length 199.2
  Top Layer w10: R2_F7.1@185,251.54 185,250 300,135 P2.8@300,100
CH13: P2.6 R6_F7.1 | length 265.3
  Top Layer w10: R6_F7.1@15,251.54 71.54,195 135,195 200,130 P2.6@200,100
CH14: P2.4 R2_F8.1 | length 992.7
  Top Layer w10: R2_F8.1@-35,861.73 -76.73,820 -100,820 -145,775 -145,260 -77.5,192.5 -0.13,192.5 47.37,145 90,145 100,135 P2.4@100,100
CH15: P2.2 R6_F8.1 | length 912
  Top Layer w10: R6_F8.1@-205,861.73 -245,821.73 -245,290 -55,100 P2.2@0,100
D0_N: P1.16 U2_DS1.3 | length 778.5
  Bottom Layer w6: P1.16@1300,1900 1285,1900 1252.5,1932.5 1265,1945 1320,1945 1346,1919 1346,1848.2 1374.2,1820 1490,1820 1641,1669 1641,1577.82 1654.2,1564.61 1665.7,1564.61 1671.5,1558.82 U2_DS1.3@1710,1558.82
D0_P: P1.17 U2_DS1.2 | length 781.8
  Bottom Layer w6: P1.17@1200,2000 1241,1959 1325.8,1959 1360,1924.8 1360,1854 1380,1834 1495.8,1834 1655,1674.8 1655,1583.61 1660,1578.61 1665.7,1578.61 1671.5,1584.41 U2_DS1.2@1710,1584.41
D1_N: P1.18 U2_DS1.5 | length 937.6
  Bottom Layer w6: P1.18@1200,1900 1160,1940 1155,1935 1155,1819 1195,1779 1491,1779 1625,1645 1625,1526.84 1650,1501.84 1665.7,1501.84 1671.5,1507.64 U2_DS1.5@1710,1507.64
D1_P: P1.19 U2_DS1.6 | length 979.2
  Bottom Layer w6: P1.19@1100,2000 1141,1959 1141,1813.2 1189.2,1765 1485.2,1765 1611,1639.2 1611,1521.04 1644.2,1487.84 1665.7,1487.84 1671.5,1482.05 U2_DS1.6@1710,1482.05
D2_N: P1.26 U2_DS1.11 | length 1298.5
  Bottom Layer w6: P1.26@800,1900 785,1900 750,1935 762.86,1947.86 784.61,1947.86 785,1947.47 817.53,1947.47 841,1924 841,1864.2 875.2,1830 889.2,1816 1074.2,1816 1185.2,1705 1490.2,1705 1575,1620.2 1575,1501.25 1550,1476.25 1518.07,1476.25 1512.28,1482.05 U2_DS1.11@1473.78,1482.05
D2_P: P1.27 U2_DS1.10 | length 1341.2
  Bottom Layer w6: P1.27@700,2000 738.14,1961.86 782.86,1961.86 783.26,1962.26 784.04,1961.47 823.33,1961.47 855,1929.8 855,1870 895,1830 1080,1830 1191,1719 1496,1719 1589,1626 1589,1495.45 1555.8,1462.25 1518.07,1462.25 1512.28,1456.46 U2_DS1.10@1473.78,1456.46
D3_N: P1.28 U2_DS1.13 | length 1272.2
  Bottom Layer w6: P1.28@700,1900 670,1930 660,1930 660,1850 715,1795 1020,1795 1151,1664 1500.8,1664 1554,1610.8 1554,1552.22 1540.8,1539.02 1518.08,1539.02 1512.28,1533.23 U2_DS1.13@1473.78,1533.23
D3_P: P1.29 U2_DS1.14 | length 1285.6
  Bottom Layer w6: P1.29@600,2000 600,1980 646,1934 646,1844.2 700.2,1790 709.2,1781 1014.2,1781 1145.2,1650 1495,1650 1540,1605 1540,1558.02 1535,1553.02 1518.08,1553.02 1512.28,1558.82 U2_DS1.14@1473.78,1558.82
D4_N: P1.36 U2_DS2.3 | length 1187.7
  Bottom Layer w6: P1.36@300,1900 275,1900 252.5,1922.5 270,1940 325.2,1940 341,1924.2 341,1864.2 345.1,1860.1 465.2,1740 986,1740 1051,1675 1051,1592.82 1079.2,1564.61 1090.7,1564.61 1096.5,1558.82 U2_DS2.3@1135,1558.82
D4_P: P1.37 U2_DS2.2 | length 1195.2
  Bottom Layer w6: P1.37@200,2000 246,1954 331,1954 355,1930 355,1870 471,1754 991.8,1754 1065,1680.8 1065,1598.61 1085,1578.61 1090.7,1578.61 1096.5,1584.41 U2_DS2.2@1135,1584.41
D5_N: P1.38 U2_DS2.5 | length 1364.9
  Bottom Layer w6: P1.38@200,1900 200,1930 185,1945 160,1945 160,1845 281,1724 965.8,1724 1030,1659.8 1030,1541.84 1070,1501.84 1090.7,1501.84 1096.5,1507.64 U2_DS2.5@1135,1507.64
D5_P: P1.39 U2_DS2.6 | length 1385.9
  Bottom Layer w6: P1.39@100,2000 146,1954 146,1839.2 275.2,1710 960,1710 1016,1654 1016,1536.04 1064.2,1487.84 1090.7,1487.84 1096.5,1482.05 U2_DS2.6@1135,1482.05
D6_N: P1.46 U2_DS2.11 | length 1744.1
  Bottom Layer w6: P1.46@-200,1900 -220,1900 -257.5,1937.5 -250,1945 -180,1945 -154,1919 -154,1829.2 0.2,1675 945,1675 985,1635 985,1481.25 980,1476.25 943.07,1476.25 937.28,1482.05 U2_DS2.11@898.78,1482.05
D6_P: P1.47 U2_DS2.10 | length 1773.8
  Bottom Layer w6: P1.47@-300,2000 -259,1959 -174.2,1959 -140,1924.8 -140,1835 6,1689 950.8,1689 999,1640.8 999,1475.45 985.8,1462.25 943.07,1462.25 937.28,1456.46 U2_DS2.10@898.78,1456.46
D7_N: P1.48 U2_DS2.13 | length 1734.7
  Bottom Layer w6: P1.48@-300,1900 -300,1925 -325,1950 -345,1950 -345,1845 -155,1655 864,1655 865,1654 935.8,1654 939.9,1649.9 964,1625.8 964,1547.22 955.8,1539.02 943.08,1539.02 937.28,1533.23 U2_DS2.13@898.78,1533.23
D7_P: P1.49 U2_DS2.14 | length 1698.2
  Bottom Layer w6: P1.49@-400,2000 -359,1959 -359,1839.2 -160.8,1641 858.2,1641 859.2,1640 930,1640 950,1620 950,1553.02 943.08,1553.02 937.28,1558.82 U2_DS2.14@898.78,1558.82
D8_N: P1.12 U2_DS3.3 | length 1407
  Top Layer w6: v1(674.16,1520) 680,1525.84 680,1640.8 728.2,1689 1404,1689 1545,1830 1545,1930 1530,1945 1490,1945 1475,1930 1500,1905 P1.12@1500,1900
  Bottom Layer w6: U2_DS3.3@608.11,1563.39 646.61,1563.39 652.4,1569.18 665.82,1569.18 680,1555 680,1525.84 v1(674.16,1520)